# EAGLE board All_in_One_Boards_V2.0 (EAGLE 9.6.2)
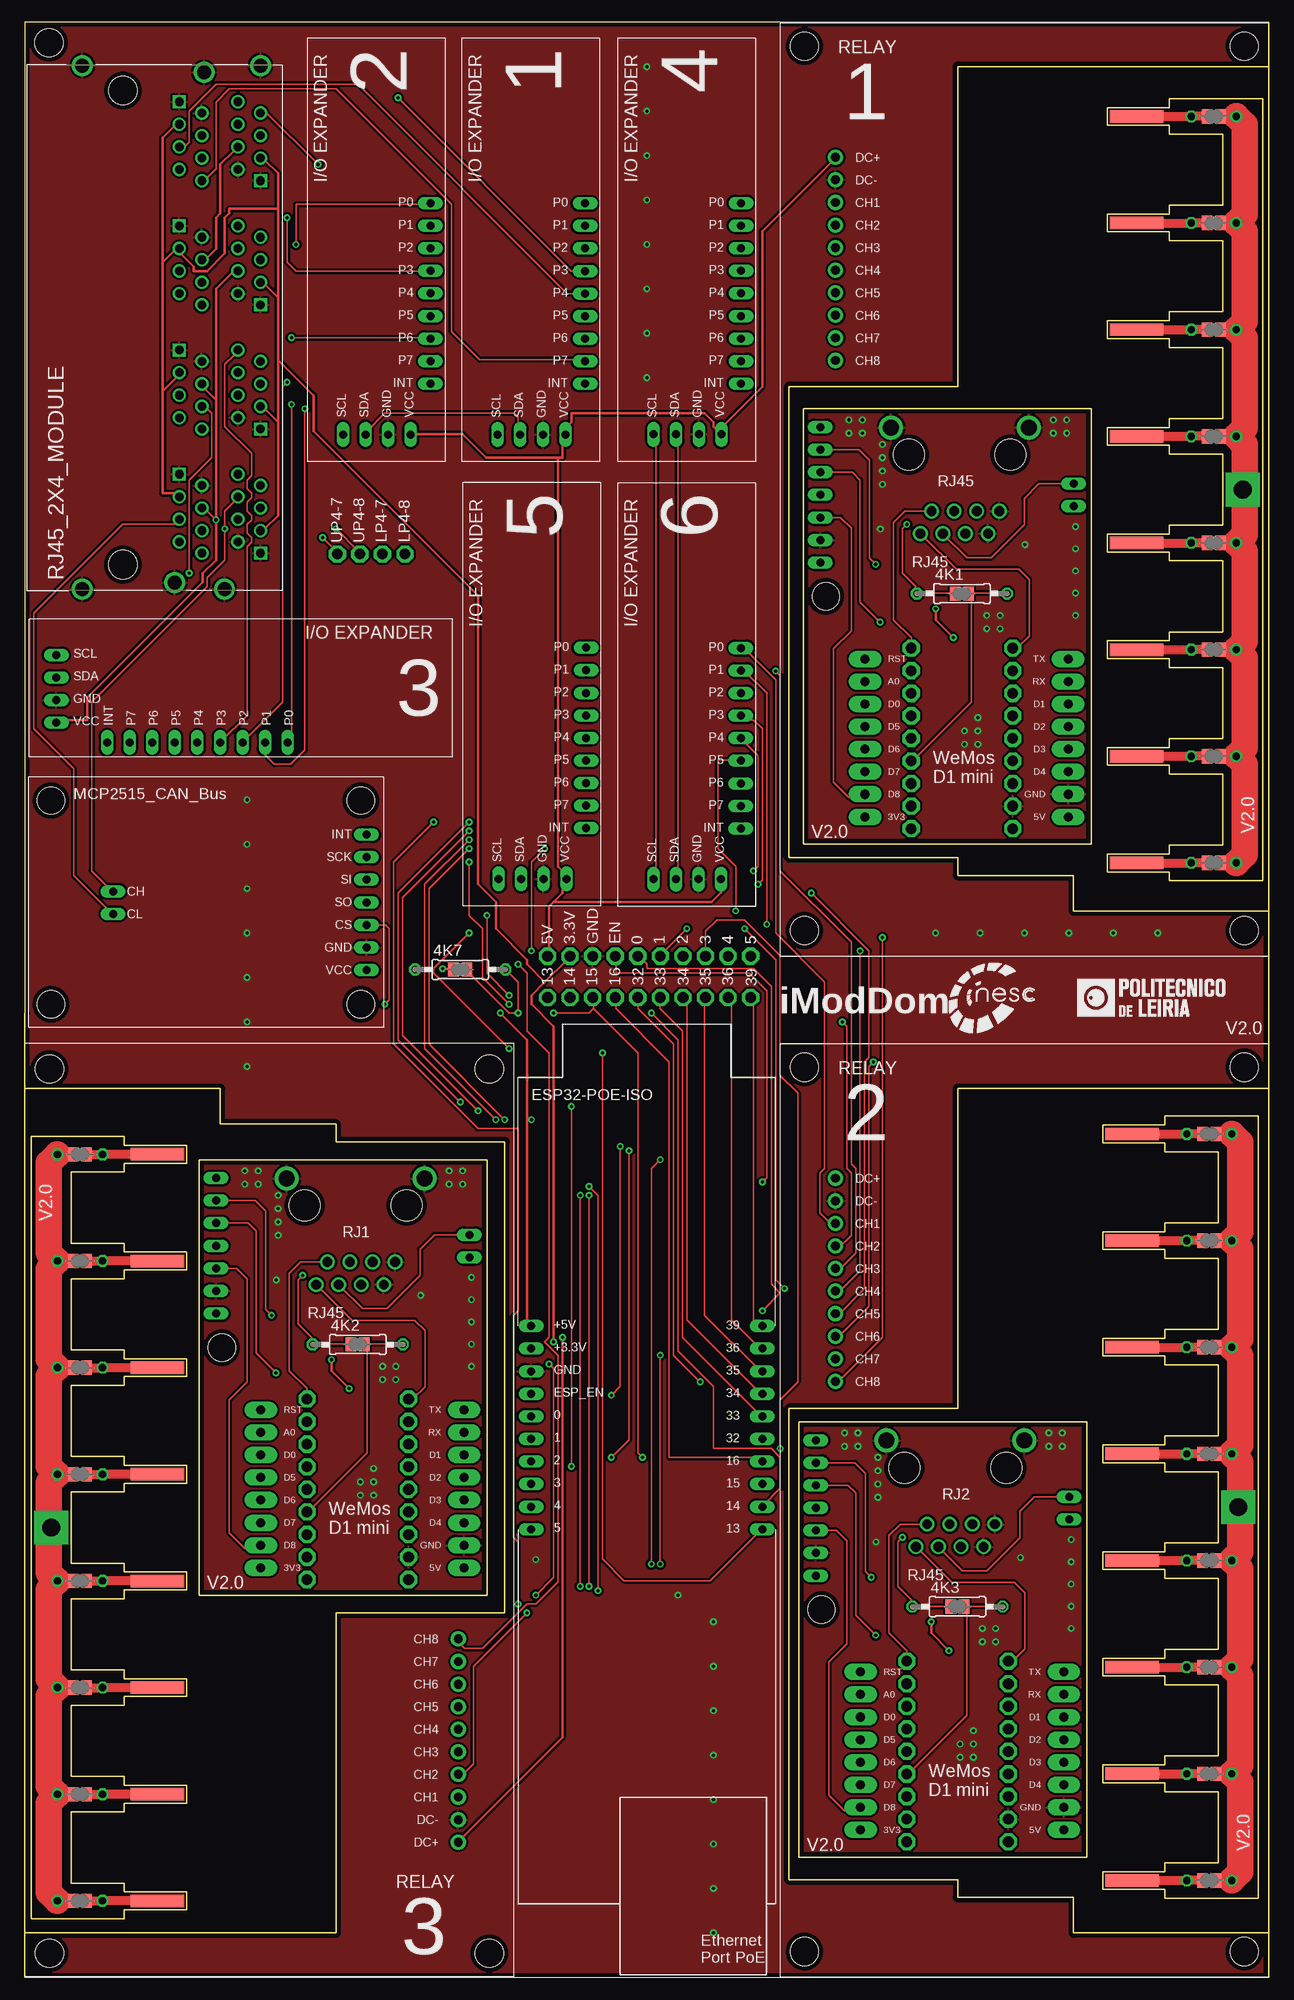
[diagram p0: board, top side]
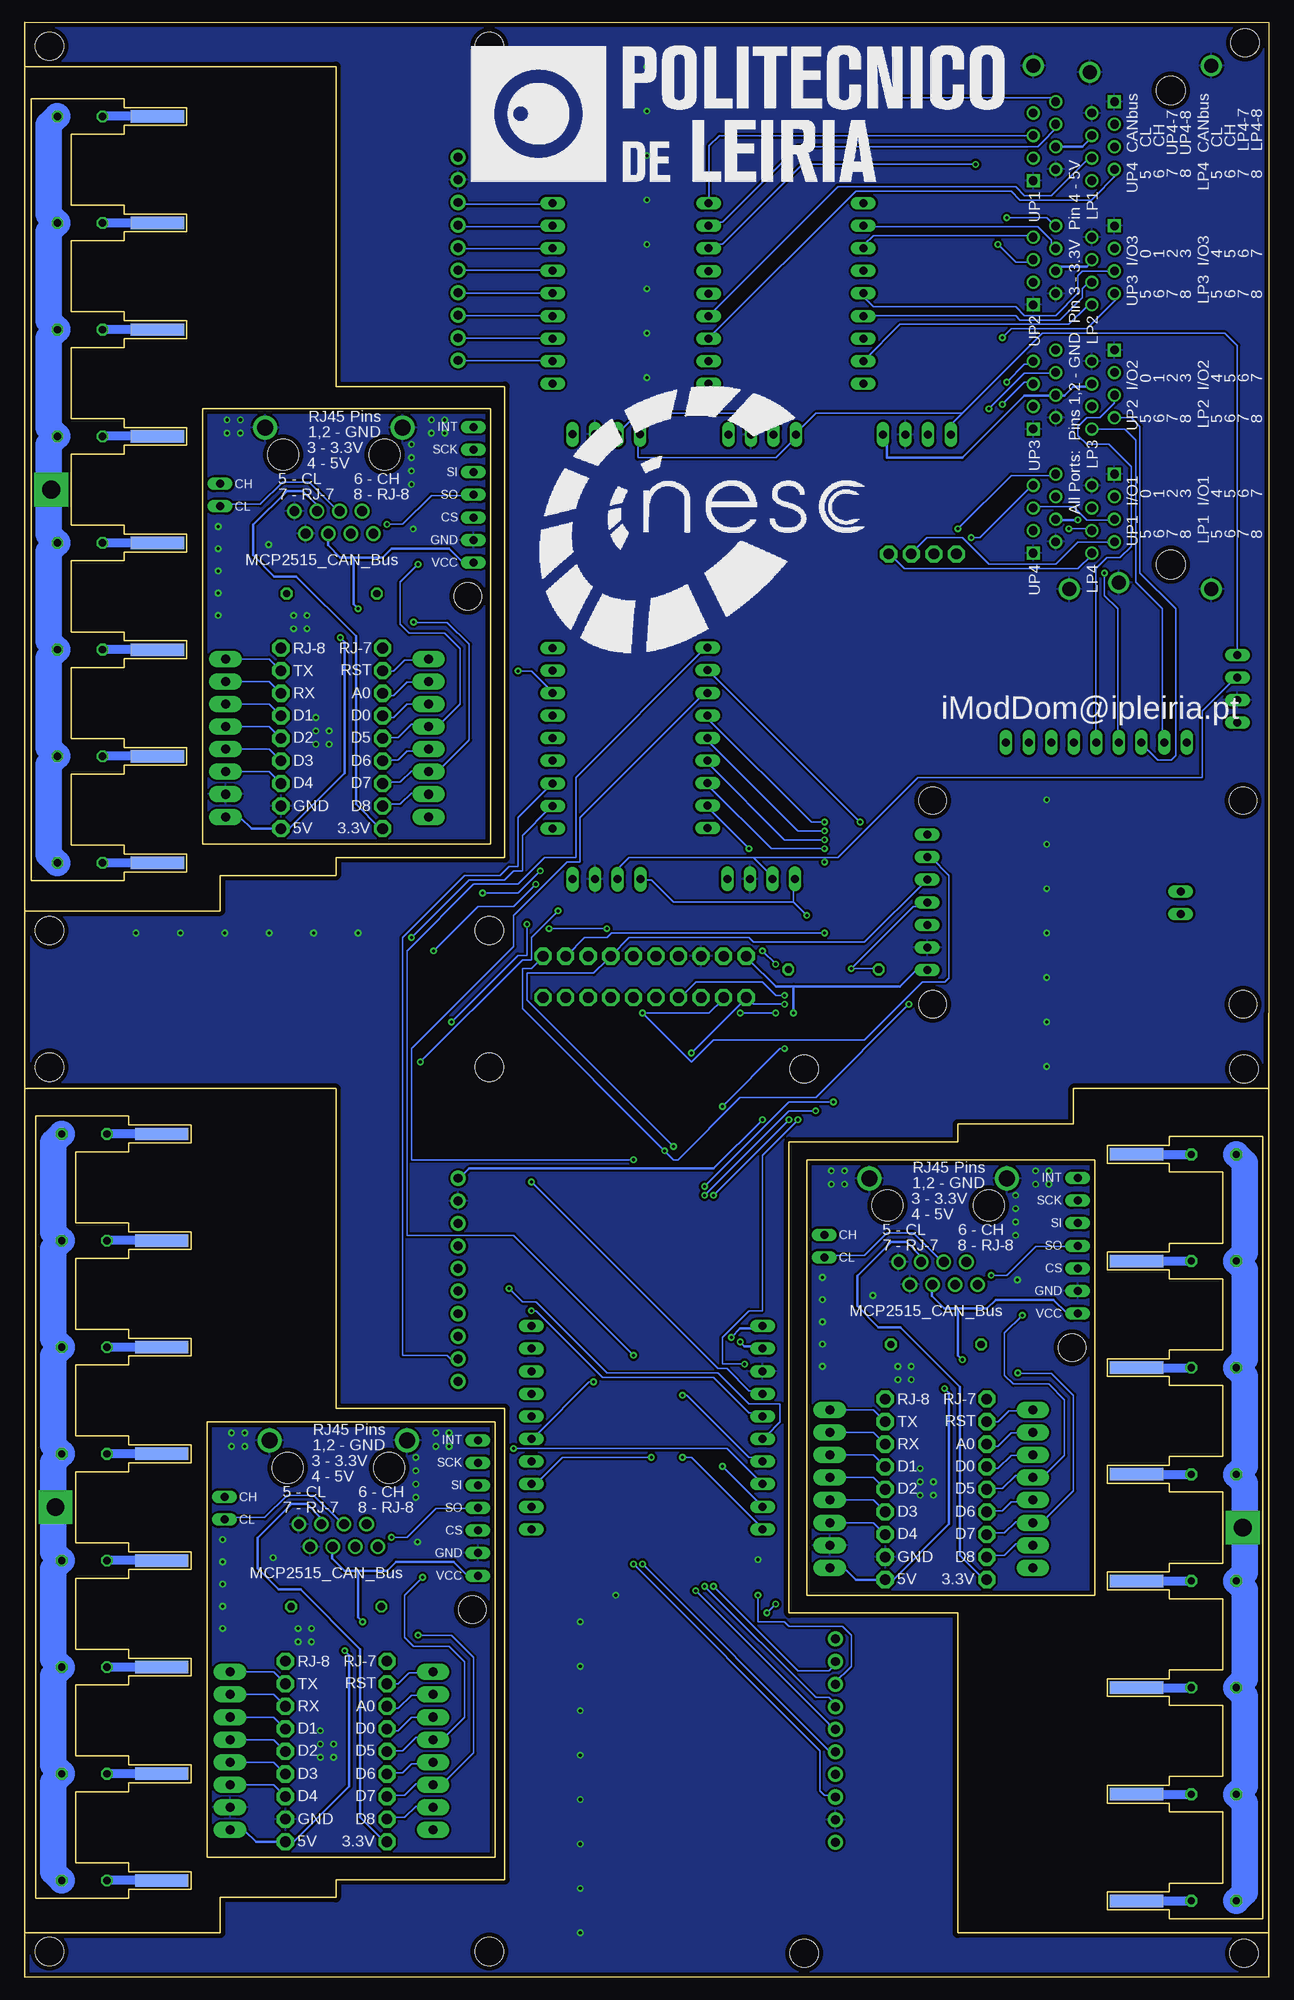
[diagram p1: board, bottom side, seen from below]

Size 140 x 220 mm. Coordinates in mm from the lower left corner, seen from the top.
Outline: 0,5 35,5 35,41 54,41 54,94 35,94 35,96 22,96 22,100 0,100
Outline: 0,5 0,0 140,0 140,5
Outline: 0,100 0,108.5 0,220 140,220 140,215
Outline: 140,215 105,215 105,179 86,179 86,126 105,126 105,124 118,124 118,120 140,120 140,100 105,100 105,64 86,64 86,11 105,11 105,9 118,9 118,5 140,5
Outline: 0,100 0,5
Outline: 140,5 140,215
Outline: 87.6,127.5 87.6,176.5 120,176.5 120,127.5 87.6,127.5
Outline: 19.6,43 19.6,92 52,92 52,43 19.6,43
Outline: 87.1,13.5 87.1,62.5 119.5,62.5 119.5,13.5 87.1,13.5
Copper layers (1*16): Top 0.035mm / dielectric 1.5mm / Bottom 0.035mm
Design rules "default *": minimum track width 6mil, minimum drill 0.35mm, track to track 0.25mm, track to pad 0.25mm, pad to pad 6mil, via to via 6mil, smd to smd 6mil, copper to edge 0.5mm, drill to drill 6mil, minimum pad ring 10mil, minimum via ring 8mil, stop-mask expansion 4mil, vias tented up to drill 0mil, thermal gap 10mil
Net classes: 0 default: width 0.15 mm; 1 +5V: width 0.305 mm; 2 GND: width 0.305 mm; 3 +3.3V: width 0.305 mm; 4 SCL: width 0.15 mm; 5 SDA: width 0.15 mm
Holes 3.2 mm at 2.7,217.7

## Footprints (pad centres in the part's own frame; a part is rotated, then mirrored left to right if it is on the bottom)
0207/10 = drill 0.813 octagon: 1 -5.08,0; 2 5.08,0
ESP-POE = drill 0.9 pad 1.3 long: 0 0,-10.16; 1 0,-12.7; 2 0,-15.24; 3 0,-17.78; 3V3 0,-2.54; 4 0,-20.32; 5 0,-22.86; 5V 0,0; 13 26,-22.86; 14 26,-20.32; 15 26,-17.78; 16 26,-15.24; 32 26,-12.7; 33 26,-10.16; 34 26,-7.62; 35 26,-5.08; 36 26,-2.54; 39 26,0; ESP_EN 0,-7.62; GND 0,-5.08
WEMOS-D1-MINI_SEM_LAYOUT = drill 1.016 pad 1.829 long: 3V3 -10.16,-10.16; 5V 12.7,-10.16; A0 -10.16,5.08; D0 -10.16,2.54; D1 12.7,2.54; D2 12.7,0; D3 12.7,-2.54; D4 12.7,-5.08; D5 -10.16,0; D6 -10.16,-2.54; D7 -10.16,-5.08; D8 -10.16,-7.62; GND 12.7,-7.62; RESET -10.16,7.62; RX 12.7,5.08; TX 12.7,7.62
PCF8574-MODULE_ESPELHADO = drill 0.9 pad 1.3 long: GND 0,-5.08; INT 5.71,-9.85; P0 26.03,-9.85; P1 23.49,-9.85; P2 20.95,-9.85; P3 18.41,-9.85; P4 15.87,-9.85; P5 13.33,-9.85; P6 10.79,-9.85; P7 8.25,-9.85; SCL 0,0; SDA 0,-2.54; VCC 0,-7.62
0204/5 = drill 0.813 octagon: 1 -2.54,0; 2 2.54,0
SSR_M_SEM_LIGACOES = drill 1 pad 1.7: CH1 17.58,3.5; CH2 20.12,3.5; CH3 22.66,3.5; CH4 25.2,3.5; CH5 27.74,3.5; CH6 30.28,3.5; CH7 32.82,3.5; CH8 35.36,3.5; DC+ 12.5,3.5; DC- 15.04,3.5 | hole 3.2: 0,0; 99.5,0; 99.5,49.5; 0,49.5
ALI-RJ45_SEM_LAYOUT = drill 1.1: 1 -4.445,6.35; 2 -3.175,8.89; 3 -1.905,6.35; 4 -0.635,8.89; 5 0.635,6.35; 6 1.905,8.89; 7 3.175,6.35; 8 4.445,8.89 | drill 1.8: P$1 -7.75,-3.05; P$2 7.75,-3.05 | hole 3.5: -5.715,0; 5.715,0
TE_5569262-1 = drill 0.97 square: LP1-1 0,0; LP2-1 13.97,0; LP3-1 27.94,0; LP4-1 41.91,0; UP1-1 8.89,9.14; UP2-1 22.86,9.14; UP3-1 36.83,9.14; UP4-1 50.8,9.14 | drill 0.97: LP1-2 1.27,2.54; LP1-3 2.54,0; LP1-4 3.81,2.54; LP1-5 5.08,0; LP1-6 6.35,2.54; LP1-7 7.62,0; LP1-8 8.89,2.54; LP2-2 15.24,2.54; LP2-3 16.51,0; LP2-4 17.78,2.54; LP2-5 19.05,0; LP2-6 20.32,2.54; LP2-7 21.59,0; LP2-8 22.86,2.54; LP3-2 29.21,2.54; LP3-3 30.48,0; LP3-4 31.75,2.54; LP3-5 33.02,0; LP3-6 34.29,2.54; LP3-7 35.56,0; LP3-8 36.83,2.54; LP4-2 43.18,2.54; LP4-3 44.45,0; LP4-4 45.72,2.54; LP4-5 46.99,0; LP4-6 48.26,2.54; LP4-7 49.53,0; LP4-8 50.8,2.54; UP1-2 7.62,6.6; UP1-3 6.35,9.14; UP1-4 5.08,6.6; UP1-5 3.81,9.14; UP1-6 2.54,6.6; UP1-7 1.27,9.14; UP1-8 0,6.6; UP2-2 21.59,6.6; UP2-3 20.32,9.14; UP2-4 19.05,6.6; UP2-5 17.78,9.14; UP2-6 16.51,6.6; UP2-7 15.24,9.14; UP2-8 13.97,6.6; UP3-2 35.56,6.6; UP3-3 34.29,9.14; UP3-4 33.02,6.6; UP3-5 31.75,9.14; UP3-6 30.48,6.6; UP3-7 29.21,9.14; UP3-8 27.94,6.6; UP4-2 49.53,6.6; UP4-3 48.26,9.14; UP4-4 46.99,6.6; UP4-5 45.72,9.14; UP4-6 44.45,6.6; UP4-7 43.18,9.14; UP4-8 41.91,6.6 | drill 1.57: S1 -4.06,-10.92; S2 54.87,-10.92; S3 -4.06,9.14; S4 54.11,-0.51; S5 -3.3,2.79; S6 54.87,5.08 | hole 3.25: -1.27,-6.35; 52.08,-6.35
SJ = smd 1.168 x 1.6: 1 -0.762,0; 2 0.762,0
TP = drill 1.2 pad 1.93 octagon: P$1 0,0
MCP2515_MODULE_SEM_LIGACOES = drill 0.9 pad 1.3 long: CH -27.925,12.703; CL -27.925,10.163; CS 0.605,8.923; GND 0.605,6.383; INT 0.605,19.083; MISO 0.605,11.463; MOSI 0.605,14.003; SCK 0.605,16.543; VCC 0.605,3.843 | hole 3.1: -0.035,0.013; -0.035,22.913; -34.935,22.913; -34.935,0.013
MCP2515_MODULE_SEM_LAYOUT = drill 0.9 pad 1.3 long: CH 28.52,-6.38; CL 28.52,-8.92; CS 0,-10.16; GND 0,-12.7; INT 0,0; MISO 0,-7.62; MOSI 0,-5.08; SCK 0,-2.54; VCC 0,-15.24 | hole 3.1: 0.63,-19.07
SHUNT2 = smd 1.4 x 6: P$1 -85,-3.3; P$2 -73,-3.3; P$3 -61,-3.3; P$4 -49,-3.3; P$5 -37,-3.3; P$6 -25,-3.3; P$7 -13,-3.3; P$8 -1,-3.3 | smd 1.4 x 6 bottom: P$10 -85,-3.3; P$11 -73,-3.3; P$12 -61,-3.3; P$13 -49,-3.3; P$14 -37,-3.3; P$15 -25,-3.3; P$16 -13,-3.3; P$17 -1,-3.3 | drill 2 pad 3.81 square: P$18 -43,-15.25

## Placement (x,y rotation side)
4K1  [0207/10]  105.46,155.71 0 top
4K2  [0207/10]  37.46,71.21 0 top
4K3  [0207/10]  104.96,41.71 0 top
4K7  [0207/10]  49,113.4 0 top
ESP32-POE-ISO  ESP-POE  [ESP-POE]  56.98,73.28 0 top
ESP8266D1MINI  [WEMOS-D1-MINI_SEM_LAYOUT]  104.72,140.74 0 top
ESP8266D1MINI1  [WEMOS-D1-MINI_SEM_LAYOUT]  36.72,56.24 0 top
ESP8266D1MINI2  [WEMOS-D1-MINI_SEM_LAYOUT]  104.22,26.74 0 top
I/O_EXPANDER  PCF8574-MODULE_ESPELHADO  [PCF8574-MODULE_ESPELHADO]  53.32,123.59 90 top
I/O_EXPANDER_1  PCF8574-MODULE_ESPELHADO  [PCF8574-MODULE_ESPELHADO]  53.21,173.6 90 top
I/O_EXPANDER_2  PCF8574-MODULE_ESPELHADO  [PCF8574-MODULE_ESPELHADO]  35.81,173.62 90 top
I/O_EXPANDER_3  PCF8574-MODULE_ESPELHADO  [PCF8574-MODULE_ESPELHADO]  3.54,148.8 0 top
I/O_EXPANDER_4  PCF8574-MODULE_ESPELHADO  [PCF8574-MODULE_ESPELHADO]  70.76,173.62 90 top
I/O_EXPANDER_6  PCF8574-MODULE_ESPELHADO  [PCF8574-MODULE_ESPELHADO]  70.74,123.56 90 top
R1  [0204/5]  133.3,10.9 180 top
R2  [0204/5]  133.3,22.9 180 top
R3  [0204/5]  133.3,34.9 180 top
R4  [0204/5]  133.3,46.9 180 top
R5  [0204/5]  133.3,58.9 180 top
R6  [0204/5]  133.3,70.9 180 top
R7  [0204/5]  133.3,82.9 180 top
R8  [0204/5]  133.3,94.9 180 top
R9  [0204/5]  6.2,92.6 0 top
R10  [0204/5]  6.2,80.6 0 top
R11  [0204/5]  133.8,125.4 180 top
R12  [0204/5]  6.2,68.6 0 top
R13  [0204/5]  6.2,56.6 0 top
R14  [0204/5]  6.2,44.6 0 top
R15  [0204/5]  6.2,32.6 0 top
R16  [0204/5]  6.2,20.6 0 top
R17  [0204/5]  6.2,8.6 0 top
R18  [0204/5]  133.8,137.4 180 top
R19  [0204/5]  133.8,149.4 180 top
R20  [0204/5]  133.8,161.4 180 top
R21  [0204/5]  133.8,173.4 180 top
R22  [0204/5]  133.8,185.4 180 top
R23  [0204/5]  133.8,197.4 180 top
R24  [0204/5]  133.8,209.4 180 top
RELAY_1  SSR_M_FULL_SEM_LIGACOES  [SSR_M_SEM_LIGACOES]  87.74,217.3 270 top
RELAY_2  SSR_M_FULL_SEM_LIGACOES  [SSR_M_SEM_LIGACOES]  52.28,2.7 90 top
RELAY_3  SSR_M_FULL_SEM_LIGACOES  [SSR_M_SEM_LIGACOES]  87.74,102.41 270 top
RJ1  ALI-RJ45_SEM_LAYOUT  [ALI-RJ45_SEM_LAYOUT]  37.22,86.84 180 top
RJ2  ALI-RJ45_SEM_LAYOUT  [ALI-RJ45_SEM_LAYOUT]  104.72,57.34 180 top
RJ45  ALI-RJ45_SEM_LAYOUT  [ALI-RJ45_SEM_LAYOUT]  105.22,171.34 180 top
RJ45_2X4_MODULE  5569262-1  [TE_5569262-1]  17.38,211.06 270 top
SJ1  [SJ]  49,113.4 0 top
SJ2  [SJ]  105.46,155.71 0 top
SJ3  [SJ]  37.46,71.21 0 top
SJ4  [SJ]  133.3,58.9 180 top
SJ5  [SJ]  133.3,82.9 180 top
SJ6  [SJ]  133.3,94.9 180 top
SJ7  [SJ]  133.3,10.9 180 top
SJ8  [SJ]  133.3,22.9 180 top
SJ9  [SJ]  133.3,34.9 180 top
SJ10  [SJ]  133.8,173.4 180 top
SJ11  [SJ]  133.3,46.9 180 top
SJ12  [SJ]  133.3,70.9 180 top
SJ13  [SJ]  6.2,44.6 0 top
SJ14  [SJ]  6.2,20.6 0 top
SJ15  [SJ]  6.2,8.6 0 top
SJ16  [SJ]  6.2,92.6 0 top
SJ17  [SJ]  133.8,197.4 180 top
SJ18  [SJ]  6.2,80.6 0 top
SJ19  [SJ]  133.8,209.4 180 top
SJ20  [SJ]  133.8,125.4 180 top
SJ21  [SJ]  133.8,137.4 180 top
SJ22  [SJ]  133.8,149.4 180 top
SJ23  [SJ]  133.8,161.4 180 top
SJ24  [SJ]  133.8,185.4 180 top
SJ25  [SJ]  6.2,68.6 0 top
SJ26  [SJ]  6.2,56.6 0 top
SJ27  [SJ]  6.2,32.6 0 top
SJ28  [SJ]  104.96,41.71 0 top
U$1  TP  [TP]  35.16,160.16 90 top
U$2  TP  [TP]  58.82,114.9 90 top
U$3  TP  [TP]  99.75,147.03 0 top
U$4  TP  [TP]  37.7,160.16 0 bottom
U$5  TP  [TP]  40.24,160.16 0 top
U$6  TP  [TP]  61.36,114.9 90 bottom
U$7  TP  [TP]  63.9,114.9 90 top
U$8  TP  [TP]  66.44,114.9 90 top
U$9  TP  [TP]  68.98,114.9 90 top
U$10  TP  [TP]  71.52,114.9 90 top
U$11  TP  [TP]  74.06,114.9 90 top
U$12  TP  [TP]  76.6,114.9 90 bottom
U$13  TP  [TP]  79.14,114.9 90 bottom
U$14  TP  [TP]  81.68,114.9 90 top
U$15  TP  [TP]  81.68,110.26 270 bottom
U$16  TP  [TP]  79.14,110.26 270 top
U$17  TP  [TP]  76.6,110.26 270 top
U$18  TP  [TP]  74.06,110.26 270 top
U$19  TP  [TP]  71.52,110.26 270 top
U$20  TP  [TP]  68.98,110.26 270 top
U$21  TP  [TP]  66.44,110.26 270 top
U$22  TP  [TP]  63.9,110.26 270 top
U$23  TP  [TP]  61.36,110.26 270 top
U$24  TP  [TP]  58.82,110.26 270 top
U$25  TP  [TP]  42.78,160.16 0 top
U$26  MCP2515_MODULE_SEM_LIGACOES  [MCP2515_MODULE_SEM_LIGACOES]  37.85,109.5 0 top
U$27  TP  [TP]  99.75,144.49 0 top
U$28  TP  [TP]  99.75,141.95 0 top
U$29  TP  [TP]  99.75,139.41 0 top
U$30  TP  [TP]  99.75,136.87 0 top
U$31  MCP2515_MODULE_SEM_LAYOUT  [MCP2515_MODULE_SEM_LAYOUT]  89.52,174.44 0 top
U$32  TP  [TP]  99.75,134.33 0 top
U$33  TP  [TP]  99.75,131.79 0 top
U$34  TP  [TP]  99.75,129.25 0 top
U$35  TP  [TP]  111.18,147.03 0 top
U$36  TP  [TP]  111.18,144.49 0 top
U$37  TP  [TP]  111.18,141.95 0 top
U$38  TP  [TP]  111.18,139.41 0 top
U$39  TP  [TP]  111.18,136.87 0 top
U$40  TP  [TP]  111.18,134.33 0 top
U$41  TP  [TP]  111.18,131.79 0 top
U$42  TP  [TP]  111.18,129.25 0 top
U$43  TP  [TP]  99.75,149.57 0 top
U$44  TP  [TP]  111.18,149.57 0 top
U$45  MCP2515_MODULE_SEM_LAYOUT  [MCP2515_MODULE_SEM_LAYOUT]  21.52,89.94 0 top
U$46  TP  [TP]  31.75,62.53 0 top
U$47  TP  [TP]  31.75,59.99 0 top
U$48  TP  [TP]  31.75,57.45 0 top
U$49  TP  [TP]  31.75,54.91 0 top
U$50  TP  [TP]  31.75,52.37 0 top
U$51  TP  [TP]  31.75,49.83 0 top
U$52  TP  [TP]  31.75,47.29 0 top
U$53  TP  [TP]  31.75,44.75 0 top
U$54  TP  [TP]  43.18,62.53 0 top
U$55  TP  [TP]  43.18,59.99 0 top
U$56  TP  [TP]  43.18,57.45 0 top
U$57  TP  [TP]  43.18,54.91 0 top
U$58  TP  [TP]  43.18,52.37 0 top
U$59  TP  [TP]  43.18,49.83 0 top
U$60  TP  [TP]  43.18,47.29 0 top
U$61  TP  [TP]  43.18,44.75 0 top
U$62  TP  [TP]  31.75,65.07 0 top
U$63  TP  [TP]  43.18,65.07 0 top
U$64  SHUNT2  [SHUNT2]  121.8,210.4 90 top
U$65  SHUNT2  [SHUNT2]  121.3,95.9 90 top
U$66  SHUNT2  [SHUNT2]  18.2,7.6 270 top
U$67  MCP2515_MODULE_SEM_LAYOUT  [MCP2515_MODULE_SEM_LAYOUT]  89.02,60.44 0 top
U$68  TP  [TP]  99.25,33.03 0 top
U$69  TP  [TP]  99.25,30.49 0 top
U$70  TP  [TP]  99.25,27.95 0 top
U$71  TP  [TP]  99.25,25.41 0 top
U$72  TP  [TP]  99.25,22.87 0 top
U$73  TP  [TP]  99.25,20.33 0 top
U$74  TP  [TP]  99.25,17.79 0 top
U$75  TP  [TP]  99.25,15.25 0 top
U$76  TP  [TP]  110.68,33.03 0 top
U$77  TP  [TP]  110.68,30.49 0 top
U$78  TP  [TP]  110.68,27.95 0 top
U$79  TP  [TP]  110.68,25.41 0 top
U$80  TP  [TP]  110.68,22.87 0 top
U$81  TP  [TP]  110.68,20.33 0 top
U$82  TP  [TP]  110.68,17.79 0 top
U$83  TP  [TP]  110.68,15.25 0 top
U$84  TP  [TP]  99.25,35.57 0 top
U$85  TP  [TP]  110.68,35.57 0 top

## Library data of the parts
4K1-4K3 4K7 R1-R24 = rcl; SPICEPREFIX: R
ESP32-POE-ISO = ESP-POE-RevB
ESP8266D1MINI ESP8266D1MINI1 ESP8266D1MINI2 = esp8266modules
I/O_EXPANDER I/O_EXPANDER_1-I/O_EXPANDER_4 I/O_EXPANDER_6 = PCF8574_Module
RELAY_1-RELAY_3 = Solid-State-Relay_Module
RJ1 RJ2 RJ45 = AliExpressRJ45
RJ45_2X4_MODULE = RJ45_2x4; AVAILABILITY: Good; CENTERLINE_PITCH: 1.02 mm[.04 in]; COMMENT: 5569262-1; DESCRIPTION: Conn RJ-45 F 64 POS 2.54mm Solder RA Thru-Hole 64 Terminal 8 Port Cat 5 Tray; EU_ROHS_COMPLIANCE: Compliant; MF: TE Connectivity; MP: 5569262-1; NUMBER_OF_POSITIONS: 8; PACKAGE: None; PRICE: None; PURCHASE-URL: https://pricing.snapeda.com/search/part/5569262-1/?ref=eda
SJ1-SJ28 = jumper
U$1-U$25 U$27-U$30 U$32-U$44 U$46-U$63 U$68-U$85 = edurobotParts
U$26 U$31 U$45 U$67 = MCP2515_Module
U$64-U$66 = Shunt2

## Nets
+3V3 [+3.3V]: ESP32-POE-ISO.3V3 RJ45_2X4_MODULE.LP1-3 RJ45_2X4_MODULE.LP2-3 RJ45_2X4_MODULE.LP3-3 RJ45_2X4_MODULE.LP4-3 RJ45_2X4_MODULE.UP1-3 RJ45_2X4_MODULE.UP2-3 RJ45_2X4_MODULE.UP3-3 RJ45_2X4_MODULE.UP4-3 U$6.P$1
+5V [+5V]: ESP32-POE-ISO.5V I/O_EXPANDER.VCC I/O_EXPANDER_1.VCC I/O_EXPANDER_2.VCC I/O_EXPANDER_3.VCC I/O_EXPANDER_4.VCC I/O_EXPANDER_6.VCC RELAY_1.DC+ RELAY_2.DC+ RELAY_3.DC+ RJ45_2X4_MODULE.LP1-4 RJ45_2X4_MODULE.LP2-4 RJ45_2X4_MODULE.LP3-4 RJ45_2X4_MODULE.LP4-4 RJ45_2X4_MODULE.UP1-4 RJ45_2X4_MODULE.UP2-4 RJ45_2X4_MODULE.UP3-4 RJ45_2X4_MODULE.UP4-4 U$2.P$1 U$26.VCC
GND [GND]: ESP32-POE-ISO.GND I/O_EXPANDER.GND I/O_EXPANDER_1.GND I/O_EXPANDER_2.GND I/O_EXPANDER_3.GND I/O_EXPANDER_4.GND I/O_EXPANDER_6.GND RELAY_1.DC- RELAY_2.DC- RELAY_3.DC- RJ45_2X4_MODULE.LP1-1 RJ45_2X4_MODULE.LP1-2 RJ45_2X4_MODULE.LP2-1 RJ45_2X4_MODULE.LP2-2 RJ45_2X4_MODULE.LP3-1 RJ45_2X4_MODULE.LP3-2 RJ45_2X4_MODULE.LP4-1 RJ45_2X4_MODULE.LP4-2 RJ45_2X4_MODULE.S1 RJ45_2X4_MODULE.S2 RJ45_2X4_MODULE.S3 RJ45_2X4_MODULE.S4 RJ45_2X4_MODULE.S5 RJ45_2X4_MODULE.S6 RJ45_2X4_MODULE.UP1-1 RJ45_2X4_MODULE.UP1-2 RJ45_2X4_MODULE.UP2-1 RJ45_2X4_MODULE.UP2-2 RJ45_2X4_MODULE.UP3-1 RJ45_2X4_MODULE.UP3-2 RJ45_2X4_MODULE.UP4-1 RJ45_2X4_MODULE.UP4-2 U$7.P$1 U$26.GND
GND1 [GND]: ESP8266D1MINI.GND RJ45.1 RJ45.2 RJ45.P$1 RJ45.P$2 U$31.GND U$41.P$1
GND2 [GND]: ESP8266D1MINI1.GND RJ1.1 RJ1.2 RJ1.P$1 RJ1.P$2 U$45.GND U$60.P$1
GND3 [GND]: ESP8266D1MINI2.GND RJ2.1 RJ2.2 RJ2.P$1 RJ2.P$2 U$67.GND U$82.P$1
N$1: I/O_EXPANDER_1.P0 RJ45_2X4_MODULE.UP1-5
N$2: I/O_EXPANDER_1.P1 RJ45_2X4_MODULE.UP1-6
N$3: I/O_EXPANDER_1.P2 RJ45_2X4_MODULE.UP1-7
N$4: ESP32-POE-ISO.ESP_EN U$8.P$1
N$5: ESP32-POE-ISO.0 U$9.P$1
N$6: ESP32-POE-ISO.1 U$10.P$1
N$7: ESP32-POE-ISO.2 U$11.P$1 U$26.MOSI
N$8: ESP32-POE-ISO.3 U$12.P$1
N$9: ESP32-POE-ISO.4 U$13.P$1
N$10: ESP32-POE-ISO.5 U$14.P$1 U$26.CS
N$11: ESP32-POE-ISO.39 U$15.P$1
N$12: ESP32-POE-ISO.36 U$16.P$1
N$13: ESP32-POE-ISO.35 U$17.P$1
N$14: ESP32-POE-ISO.34 U$18.P$1
N$15: ESP32-POE-ISO.33 U$19.P$1
N$16: ESP32-POE-ISO.32 U$20.P$1
N$17: I/O_EXPANDER_1.P3 RJ45_2X4_MODULE.UP1-8
N$18: 4K7.2 ESP32-POE-ISO.15 SJ1.2 U$22.P$1
N$19: ESP32-POE-ISO.14 U$23.P$1 U$26.SCK
N$20: I/O_EXPANDER_2.P0 RJ45_2X4_MODULE.UP2-5
N$21: I/O_EXPANDER_4.P0 RELAY_1.CH1
N$22: I/O_EXPANDER_4.P1 RELAY_1.CH2
N$23: I/O_EXPANDER_4.P2 RELAY_1.CH3
N$24: I/O_EXPANDER_4.P3 RELAY_1.CH4
N$25: I/O_EXPANDER_4.P4 RELAY_1.CH5
N$26: I/O_EXPANDER_2.P1 RJ45_2X4_MODULE.UP2-6
N$27: I/O_EXPANDER_4.P5 RELAY_1.CH6
N$28: I/O_EXPANDER_4.P6 RELAY_1.CH7
N$29: I/O_EXPANDER_4.P7 RELAY_1.CH8
N$30: I/O_EXPANDER_6.P0 RELAY_3.CH1
N$31: I/O_EXPANDER_6.P1 RELAY_3.CH2
N$32: I/O_EXPANDER_6.P2 RELAY_3.CH3
N$33: I/O_EXPANDER_6.P3 RELAY_3.CH4
N$34: I/O_EXPANDER_6.P4 RELAY_3.CH5
N$35: I/O_EXPANDER_6.P5 RELAY_3.CH6
N$36: I/O_EXPANDER_6.P6 RELAY_3.CH7
N$37: I/O_EXPANDER_6.P7 RELAY_3.CH8
N$38: I/O_EXPANDER.P0 RELAY_2.CH1
N$39: I/O_EXPANDER.P1 RELAY_2.CH2
N$40: I/O_EXPANDER.P2 RELAY_2.CH3
N$41: I/O_EXPANDER.P3 RELAY_2.CH4
N$42: I/O_EXPANDER.P4 RELAY_2.CH5
N$43: I/O_EXPANDER.P5 RELAY_2.CH6
N$44: I/O_EXPANDER.P6 RELAY_2.CH7
N$45: I/O_EXPANDER.P7 RELAY_2.CH8
N$46: I/O_EXPANDER_1.P4 RJ45_2X4_MODULE.LP1-5
N$47: I/O_EXPANDER_1.P5 RJ45_2X4_MODULE.LP1-6
N$48: I/O_EXPANDER_1.P6 RJ45_2X4_MODULE.LP1-7
N$49: I/O_EXPANDER_1.P7 RJ45_2X4_MODULE.LP1-8
N$50: I/O_EXPANDER_2.P2 RJ45_2X4_MODULE.UP2-7
N$51: I/O_EXPANDER_2.P3 RJ45_2X4_MODULE.UP2-8
N$52: I/O_EXPANDER_2.P4 RJ45_2X4_MODULE.LP2-5
N$53: I/O_EXPANDER_2.P5 RJ45_2X4_MODULE.LP2-6
N$54: I/O_EXPANDER_2.P6 RJ45_2X4_MODULE.LP2-7
N$55: I/O_EXPANDER_2.P7 RJ45_2X4_MODULE.LP2-8
N$56: 4K7.1 SJ1.1 U$26.MISO
N$57: I/O_EXPANDER_3.P0 RJ45_2X4_MODULE.UP3-5
N$58 [SCL]: RJ45_2X4_MODULE.LP4-5 RJ45_2X4_MODULE.UP4-5 U$26.CL
N$59: I/O_EXPANDER_3.P1 RJ45_2X4_MODULE.UP3-6
N$60: I/O_EXPANDER_3.P2 RJ45_2X4_MODULE.UP3-7
N$61: I/O_EXPANDER_3.P3 RJ45_2X4_MODULE.UP3-8
N$62: I/O_EXPANDER_3.P4 RJ45_2X4_MODULE.LP3-5
N$63: I/O_EXPANDER_3.P5 RJ45_2X4_MODULE.LP3-6
N$64: I/O_EXPANDER_3.P6 RJ45_2X4_MODULE.LP3-7
N$65: I/O_EXPANDER_3.P7 RJ45_2X4_MODULE.LP3-8
N$66 [+3.3V]: RJ45.3 U$34.P$1
N$67: RJ45.7 U$43.P$1
N$68: RJ45.8 U$44.P$1
N$69: RJ45_2X4_MODULE.UP4-7 U$1.P$1
N$70: RJ45_2X4_MODULE.UP4-8 U$4.P$1
N$71: RJ45_2X4_MODULE.LP4-7 U$5.P$1
N$72: RJ45_2X4_MODULE.LP4-8 U$25.P$1
N$73 [SCL]: RJ45_2X4_MODULE.LP4-6 RJ45_2X4_MODULE.UP4-6 U$26.CH
N$74: ESP8266D1MINI.RESET U$3.P$1
N$75: ESP8266D1MINI.A0 U$27.P$1
N$76: ESP8266D1MINI.D0 U$28.P$1
N$77: ESP8266D1MINI.D5 U$29.P$1 U$31.SCK
N$78: 4K1.2 ESP8266D1MINI.D6 SJ2.2 U$30.P$1
N$79: ESP8266D1MINI.D7 U$31.MOSI U$32.P$1
N$80: ESP8266D1MINI.D8 U$31.CS U$33.P$1
N$81: ESP8266D1MINI.D4 U$40.P$1
N$82: ESP8266D1MINI.D3 U$39.P$1
N$83: ESP8266D1MINI.D2 U$38.P$1
N$84: ESP8266D1MINI.D1 U$37.P$1
N$85: ESP8266D1MINI.RX U$36.P$1
N$86: ESP8266D1MINI.TX U$35.P$1
N$87 [+5V]: ESP8266D1MINI.5V RJ45.4 U$31.VCC U$42.P$1
N$88: RJ45.5 U$31.CL
N$89: RJ45.6 U$31.CH
N$90: 4K1.1 SJ2.1 U$31.MISO
N$91 [+3.3V]: RJ1.3 U$53.P$1
N$92: RJ1.7 U$62.P$1
N$93: RJ1.8 U$63.P$1
N$94: ESP8266D1MINI1.RESET U$46.P$1
N$95: ESP8266D1MINI1.A0 U$47.P$1
N$96: ESP8266D1MINI1.D0 U$48.P$1
N$97: ESP8266D1MINI1.D5 U$45.SCK U$49.P$1
N$98: 4K2.2 ESP8266D1MINI1.D6 SJ3.2 U$50.P$1
N$99: ESP8266D1MINI1.D7 U$45.MOSI U$51.P$1
N$100: ESP8266D1MINI1.D8 U$45.CS U$52.P$1
N$101: ESP8266D1MINI1.D4 U$59.P$1
N$102: ESP8266D1MINI1.D3 U$58.P$1
N$103: ESP8266D1MINI1.D2 U$57.P$1
N$104: ESP8266D1MINI1.D1 U$56.P$1
N$105: ESP8266D1MINI1.RX U$55.P$1
N$106: ESP8266D1MINI1.TX U$54.P$1
N$107 [+5V]: ESP8266D1MINI1.5V RJ1.4 U$45.VCC U$61.P$1
N$108: RJ1.5 U$45.CL
N$109: RJ1.6 U$45.CH
N$110: 4K2.1 SJ3.1 U$45.MISO
N$111: R18.2 SJ21.2 U$64.P$2 U$64.P$11
N$112: R19.2 SJ22.2 U$64.P$3 U$64.P$12
N$113: R20.2 SJ23.2 U$64.P$4 U$64.P$13
N$114: R21.2 SJ10.2 U$64.P$5 U$64.P$14
N$115: R22.2 SJ24.2 U$64.P$6 U$64.P$15
N$116: R23.2 SJ17.2 U$64.P$7 U$64.P$16
N$117: R24.2 SJ19.2 U$64.P$8 U$64.P$17
N$118: R11.1 R18.1 R19.1 R20.1 R21.1 R22.1 R23.1 R24.1 SJ10.1 SJ17.1 SJ19.1 SJ20.1 SJ21.1 SJ22.1 SJ23.1 SJ24.1 U$64.P$18
N$119: R11.2 SJ20.2 U$64.P$1 U$64.P$10
N$120: R2.2 SJ8.2 U$65.P$2 U$65.P$11
N$121: R3.2 SJ9.2 U$65.P$3 U$65.P$12
N$122: R4.2 SJ11.2 U$65.P$4 U$65.P$13
N$123: R5.2 SJ4.2 U$65.P$5 U$65.P$14
N$124: R6.2 SJ12.2 U$65.P$6 U$65.P$15
N$125: R7.2 SJ5.2 U$65.P$7 U$65.P$16
N$126: R8.2 SJ6.2 U$65.P$8 U$65.P$17
N$127: R1.1 R2.1 R3.1 R4.1 R5.1 R6.1 R7.1 R8.1 SJ4.1 SJ5.1 SJ6.1 SJ7.1 SJ8.1 SJ9.1 SJ11.1 SJ12.1 U$65.P$18
N$128: R1.2 SJ7.2 U$65.P$1 U$65.P$10
N$129: R10.2 SJ18.2 U$66.P$2 U$66.P$11
N$130: R12.2 SJ25.2 U$66.P$3 U$66.P$12
N$131: R13.2 SJ26.2 U$66.P$4 U$66.P$13
N$132: R14.2 SJ13.2 U$66.P$5 U$66.P$14
N$133: R15.2 SJ27.2 U$66.P$6 U$66.P$15
N$134: R16.2 SJ14.2 U$66.P$7 U$66.P$16
N$135: R17.2 SJ15.2 U$66.P$8 U$66.P$17
N$136: R9.1 R10.1 R12.1 R13.1 R14.1 R15.1 R16.1 R17.1 SJ13.1 SJ14.1 SJ15.1 SJ16.1 SJ18.1 SJ25.1 SJ26.1 SJ27.1 U$66.P$18
N$137: R9.2 SJ16.2 U$66.P$1 U$66.P$10
N$138 [+3.3V]: RJ2.3 U$75.P$1
N$139: RJ2.7 U$84.P$1
N$140: RJ2.8 U$85.P$1
N$141: ESP8266D1MINI2.RESET U$68.P$1
N$142: ESP8266D1MINI2.A0 U$69.P$1
N$143: ESP8266D1MINI2.D0 U$70.P$1
N$144: ESP8266D1MINI2.D5 U$67.SCK U$71.P$1
N$145: 4K3.2 ESP8266D1MINI2.D6 SJ28.2 U$72.P$1
N$146: ESP8266D1MINI2.D7 U$67.MOSI U$73.P$1
N$147: ESP8266D1MINI2.D8 U$67.CS U$74.P$1
N$148: ESP8266D1MINI2.D4 U$81.P$1
N$149: ESP8266D1MINI2.D3 U$80.P$1
N$150: ESP8266D1MINI2.D2 U$79.P$1
N$151: ESP8266D1MINI2.D1 U$78.P$1
N$152: ESP8266D1MINI2.RX U$77.P$1
N$153: ESP8266D1MINI2.TX U$76.P$1
N$154 [+5V]: ESP8266D1MINI2.5V RJ2.4 U$67.VCC U$83.P$1
N$155: RJ2.5 U$67.CL
N$156: RJ2.6 U$67.CH
N$157: 4K3.1 SJ28.1 U$67.MISO
SCL: ESP32-POE-ISO.16 I/O_EXPANDER.SCL I/O_EXPANDER_1.SCL I/O_EXPANDER_2.SCL I/O_EXPANDER_3.SCL I/O_EXPANDER_4.SCL I/O_EXPANDER_6.SCL U$21.P$1
SDA: ESP32-POE-ISO.13 I/O_EXPANDER.SDA I/O_EXPANDER_1.SDA I/O_EXPANDER_2.SDA I/O_EXPANDER_3.SDA I/O_EXPANDER_4.SDA I/O_EXPANDER_6.SDA U$24.P$1

## Tracks (layer width: path | path; a pad name or v marks a point on that pad's centre or on a via)
+3V3  (via drill 0.35)
  Top 0.305: v59.5,71.5 59.5,107 57,109.5 57,110.5 58.5,112 | 58.5,112 61,114.5 U$6.P$1 | 28.5,175 28.5,164.5 27,163 RJ45_2X4_MODULE.UP4-3 | 28.5,175 27,176.5 RJ45_2X4_MODULE.UP3-3 | 28.5,189 27,190.5 RJ45_2X4_MODULE.UP2-3 | 28.5,175 28.5,182 | 28.5,182 28.5,189 | 28.5,189 28.5,199 | 28.5,199 28.5,203 27,204.5 RJ45_2X4_MODULE.UP1-3 | 15.5,178.5 15.5,167 17,167 RJ45_2X4_MODULE.LP4-3 | 15.5,178.5 17,180 17,180.5 RJ45_2X4_MODULE.LP3-3 | 15.5,193 17,194.5 RJ45_2X4_MODULE.LP2-3 17.5,194.5 17.5,194 19,192.5 19,192 20.5,192 22.5,194 22.5,198 23,198.5 23,199 28.5,199 | 15.5,178.5 15.5,193 | 15.5,193 15.5,207 17,208.5 RJ45_2X4_MODULE.LP1-3 | 58.5,112 56.5,114 56.5,114.5 53,118 53,121 51,123 51,155.5 32.5,174 32.5,178 28.5,182
  Bottom 0.305: v59.5,71.5 59,71 57,71 ESP32-POE-ISO.3V3
+5V  (via drill 0.35)
  Top 0.305: 60,171 60.5,171 60.5,173.5 I/O_EXPANDER_1.VCC 61,174 61,174.5 61.5,175 61.5,176 76.5,176 77.5,175 77.5,174.5 78,174 I/O_EXPANDER_4.VCC 78.5,174 78.5,174.5 83,179 83,196.5 91,204.5 RELAY_1.DC+ | 60,171 51.91,171 49.28,173.63 43.65,173.63 43.63,173.62 I/O_EXPANDER_2.VCC | v21.5,164 21.5,159.5 20,158 20,157 7,144 7,141.5 4,141.5 I/O_EXPANDER_3.VCC | v21.5,164 20,165.5 RJ45_2X4_MODULE.LP4-4 | 21.5,177.5 20,179 RJ45_2X4_MODULE.LP3-4 | v21.5,164 21.5,177.5 | 21.5,177.5 21.5,190 23.5,192 RJ45_2X4_MODULE.UP2-4 | RJ45_2X4_MODULE.UP1-4 23.5,205.5 22,204 22,198.5 21.5,198 21.5,194.5 20,193 RJ45_2X4_MODULE.LP2-4 | 56.5,96.5 56.5,105.5 v53.5,108.5 | 56.5,96.5 56.5,73.5 ESP32-POE-ISO.5V | 59.5,121 59,120.5 59,115 U$2.P$1 | 59.5,121 60.5,122 60.5,123.5 I/O_EXPANDER.VCC 60.5,124 60.5,124.5 60,125 60,171 | I/O_EXPANDER_6.VCC 78.36,122.09 77.27,121 59.5,121 | v60.5,72 60.5,27 49,15.5 RELAY_2.DC+ | 56.5,96.5 v57,96.5
  Bottom 0.305: RJ45_2X4_MODULE.LP1-4 20,207 21,206 23.5,206 RJ45_2X4_MODULE.UP1-4 | RJ45_2X4_MODULE.LP2-4 20,193 20.5,192.5 23.5,192.5 RJ45_2X4_MODULE.UP2-4 | RJ45_2X4_MODULE.LP3-4 20,179 22,179 23,178 23.5,178 RJ45_2X4_MODULE.UP3-4 24,178 27.5,178 34.5,171 43,171 43,173.5 I/O_EXPANDER_2.VCC | v21.5,164 23.5,164 RJ45_2X4_MODULE.UP4-4 | 53.5,111.5 55.5,111.5 58.5,114.5 U$2.P$1 | 53.5,111.5 41.5,111.5 39.7,113.3 38.46,113.3 38.45,113.32 U$26.VCC | 53.5,111.5 v53.5,108.5 | v60.5,72 59.5,73 57,73 ESP32-POE-ISO.5V | v57,96.5 62.5,91 90,91 91,90 RELAY_3.DC+
GND  (via drill 0.35)
  other vias: 73.5,43 57.5,47 70,180 70,185 70,190 70,195 70,200 70,205 70,210 70,215 25,132.5 25,127.5 25,122.5 25,117.5 25,112.5 25,107.5 25,102.5 102.5,117.5 107.5,117.5 112.5,117.5 117.5,117.5 122.5,117.5 127.5,117.5 77.5,40 77.5,35 77.5,30 77.5,25 77.5,20 77.5,15 77.5,10 77.5,5
  pour Top: -10,230 -10,-10 150,-10 150,230
  pour Bottom: -10,230 150,230 150,-10 -10,-10
GND1  (via drill 0.35)
  other vias: 96.29,162.98 112.56,161.22 118.25,163.25 118.25,160.75 118.25,158.25 118.25,155.75 118.25,153.25 108.25,153.25 109.75,153.25 109.75,151.75 108.25,151.75 115.75,175.25 115.75,173.75 117.25,175.25 117.25,173.75 92.75,175.25 92.75,173.75 94.25,175.25 94.25,173.75 96.5,169.5 96.5,168 96.5,171 96.5,172.5 107.25,141.75 107.25,140.25 107.25,138.75 105.75,138.75 105.75,140.25
  pour Top: 87,177.5 87,126.5 121,126.5 121,177.5
  pour Bottom: 87,177.5 87,126.5 121,126.5 121,177.5
GND2  (via drill 0.35)
  other vias: 28.29,78.48 44.56,76.72 50.25,78.75 50.25,76.25 50.25,73.75 50.25,71.25 50.25,68.75 40.25,68.75 41.75,68.75 41.75,67.25 40.25,67.25 47.75,90.75 47.75,89.25 49.25,90.75 49.25,89.25 24.75,90.75 24.75,89.25 26.25,90.75 26.25,89.25 28.5,85 28.5,83.5 28.5,86.5 28.5,88 39.25,57.25 39.25,55.75 39.25,54.25 37.75,54.25 37.75,55.75
  pour Top: 19,93 19,42 53,42 53,93
  pour Bottom: 19,93 19,42 53,42 53,93
GND3  (via drill 0.35)
  other vias: 95.79,48.98 112.06,47.22 117.75,49.25 117.75,46.75 117.75,44.25 117.75,41.75 117.75,39.25 107.75,39.25 109.25,39.25 109.25,37.75 107.75,37.75 115.25,61.25 115.25,59.75 116.75,61.25 116.75,59.75 92.25,61.25 92.25,59.75 93.75,61.25 93.75,59.75 96,55.5 96,54 96,57 96,58.5 106.75,27.75 106.75,26.25 106.75,24.75 105.25,24.75 105.25,26.25
  pour Top: 86.5,63.5 86.5,12.5 120.5,12.5 120.5,63.5
  pour Bottom: 86.5,63.5 86.5,12.5 120.5,12.5 120.5,63.5
N$1
  Bottom 0.152: I/O_EXPANDER_1.P0 63,200 63,206.08 61.83,207.25 RJ45_2X4_MODULE.UP1-5
N$2
  Bottom 0.152: I/O_EXPANDER_1.P1 63,197.5 61.5,197.5 53,206 26,206 23.5,208.5 RJ45_2X4_MODULE.UP1-6
N$3  (via drill 0.35)
  Top 0.152: v33,204 27,210 RJ45_2X4_MODULE.UP1-7
  Bottom 0.152: v33,204 52.5,204 61.5,195 63,195 I/O_EXPANDER_1.P2
N$4  (via drill 0.35)
  Top 0.152: v83,89.5 83.5,90 83.5,111 81.5,113 66.5,113 66.5,114.5 U$8.P$1
  Bottom 0.152: v83,89.5 62,68.5 61,68.5 58.5,66 57,66 ESP32-POE-ISO.ESP_EN
N$5  (via drill 0.35)
  Top 0.152: v83,75 85,77 84,78 84,111.5 82,113.5 70,113.5 70,114 69,115 U$9.P$1
  Bottom 0.152: v83,75 82.5,75 75,67.5 62.5,67.5 58.5,63.5 57,63.5 ESP32-POE-ISO.0
N$6  (via drill 0.35)
  Top 0.152: v85.5,77.5 84.5,78.5 84.5,114.5 v81,118 | v74.5,118 72,115.5 72,115 U$10.P$1
  Bottom 0.152: v85.5,77.5 84,76 82.5,76 74.5,68 62,68 58.5,64.5 55,64.5 55,62.5 56.5,61 ESP32-POE-ISO.1 | v74.5,118 v81,118
N$7  (via drill 0.35)
  Top 0.152: v66,65.5 67,66.5 v67,93.5
  Bottom 0.152: v66,65.5 65.5,65.5 58.5,58.5 57,58.5 ESP32-POE-ISO.2 | v67,93.5 83.5,110 83.5,113 76,113 74.5,114.5 U$11.P$1 74,115 72,117 58.5,117 58,116.5 45.5,116.5 38.5,123.5 U$26.MOSI
N$8  (via drill 0.35)
  Top 0.152: v85,59.5 85,65 87,67 87,99.5 85,101.5 85,115 81,119 77.86,119 76.6,117.74 U$12.P$1
  Bottom 0.152: v85,59.5 61,59.5 57,55.5 ESP32-POE-ISO.3
N$9  (via drill 0.35)
  Top 0.152: v61.5,98 v61.5,57.5 | v54.5,104.5 46,113 46,113.5 v50,117.5
  Bottom 0.152: v61.5,57.5 57,53 ESP32-POE-ISO.4 | v61.5,98 55,104.5 v54.5,104.5 | v50,117.5 74,117.5 74.5,117 77,117 79,115 U$13.P$1
N$10  (via drill 0.35)
  Top 0.152: v66,58.5 68,60.5 v68,93 | v40.5,109.5 41,110 41,118 40.58,118.42 U$26.CS
  Bottom 0.152: v66,58.5 65,58.5 57,50.5 ESP32-POE-ISO.5 | U$14.P$1 82,114.5 83,113.5 84,113.5 84,109 v68,93 67,92 66.5,92 59.5,99 51,99 v40.5,109.5
N$11
  Top 0.152: ESP32-POE-ISO.39 82.5,73.5 82,74 82,110 U$15.P$1
N$12
  Top 0.152: ESP32-POE-ISO.36 82.5,71 79.5,74 79.5,110 U$16.P$1
N$13
  Top 0.152: ESP32-POE-ISO.35 82.5,68.5 76.5,74.5 76.5,110 U$17.P$1
N$14
  Top 0.152: ESP32-POE-ISO.34 82.5,66 74.5,74 74.5,110 U$18.P$1
N$15
  Top 0.152: ESP32-POE-ISO.33 82.5,63.5 74,72 74,106.5 71.5,109 71.5,110 U$19.P$1
N$16  (via drill 0.35)
  Top 0.152: v76,67 73,70 73,105 69,109 69,110 U$20.P$1
  Bottom 0.152: v76,67 76.5,67 82.5,61 ESP32-POE-ISO.32
N$17  (via drill 0.35)
  Top 0.152: I/O_EXPANDER_1.P3 61.49,192.01 v42,211.5
  Bottom 0.152: v42,211.5 24,211.5 RJ45_2X4_MODULE.UP1-8
N$18  (via drill 0.35)
  Top 0.152: SJ1.2 50,113 54.5,108.5 v55.5,108.5 55.5,112 54.5,113 4K7.2 | v69.5,58.5 69,59 69,104 64,109 | 64,109 64,110 U$22.P$1 | v59.5,108.5 63.5,108.5 64,109
  Bottom 0.152: v69.5,58.5 79.5,58.5 82.5,55.5 ESP32-POE-ISO.15 | v59.5,108.5 v55.5,108.5
N$19  (via drill 0.35)
  Top 0.152: v70.5,108.5 73.5,105.5 73.5,70.5 77.5,66.5 77.5,59.5 84,59.5 85,58.5 85,55 83,53 ESP32-POE-ISO.14
  Bottom 0.152: U$23.P$1 61.5,110 63,108.5 v70.5,108.5 65,103 62.5,105.5 45.5,105.5 39,112 36.45,112 36,112.45 36,124 38,126 U$26.SCK
N$20  (via drill 0.35)
  Top 0.152: v30.5,195 30.5,199.5 45.5,199.5 I/O_EXPANDER_2.P0
  Bottom 0.152: v30.5,195 28.5,193 27,193 RJ45_2X4_MODULE.UP2-5
N$21
  Bottom 0.152: I/O_EXPANDER_4.P0 81,199.5 91,199.5 RELAY_1.CH1
N$22
  Bottom 0.152: I/O_EXPANDER_4.P1 81,197 91,197 RELAY_1.CH2
N$23
  Bottom 0.152: I/O_EXPANDER_4.P2 81,194.5 91,194.5 RELAY_1.CH3
N$24
  Bottom 0.152: I/O_EXPANDER_4.P3 80.69,192.11 91.22,192.11 RELAY_1.CH4
N$25
  Bottom 0.152: I/O_EXPANDER_4.P4 91.48,189.48 91.5,189.5 RELAY_1.CH5
N$26
  Bottom 0.152: I/O_EXPANDER_2.P1 45.5,197 26,197 24.5,195.5 24.5,194.5 24,194.5 RJ45_2X4_MODULE.UP2-6
N$27
  Bottom 0.152: I/O_EXPANDER_4.P5 81,187 91,187 RELAY_1.CH6
N$28
  Bottom 0.152: RELAY_1.CH7 91.19,184.43 80.68,184.43 I/O_EXPANDER_4.P6
N$29
  Bottom 0.152: I/O_EXPANDER_4.P7 80.83,181.94 91.25,181.94 RELAY_1.CH8
N$30
  Top 0.152: I/O_EXPANDER_6.P0 81,149.5 84.5,146 84.5,117.5 90,112 90,91 89.5,90.5 89.5,86 91,84.5 RELAY_3.CH1
N$31  (via drill 0.35)
  Top 0.152: v83.5,118.5 83.5,144.5 81,147 I/O_EXPANDER_6.P1 | v92,107.5 92.5,107 92.5,91 93,90.5 93,83.5 91.5,82 RELAY_3.CH2
  Bottom 0.152: v83.5,118.5 83.5,115 84.5,115 v92,107.5
N$32  (via drill 0.35)
  Top 0.152: v84.5,147 85,146.5 85,124.5 93,116.5 93,91.5 93.5,91 93.5,81.5 91.5,79.5 RELAY_3.CH3
  Bottom 0.152: v84.5,147 83,147 81,145 I/O_EXPANDER_6.P2
N$33  (via drill 0.35)
  Top 0.152: v82.5,123 83,123.5 83,140.5 82,141.5 81,141.5 I/O_EXPANDER_6.P3 | v94,115.5 94,79.5 91.5,77 RELAY_3.CH4
  Bottom 0.152: v82.5,123 85,120.5 89,120.5 v94,115.5
N$34  (via drill 0.35)
  Top 0.152: v82,124.5 82.5,125 82.5,137.5 81,139 I/O_EXPANDER_6.P4 | v88.5,122 95,115.5 95,103.5 94.5,103 94.5,77.5 91.5,74.5 RELAY_3.CH5
  Bottom 0.152: v82,124.5 84.5,122 v88.5,122
N$35  (via drill 0.35)
  Top 0.152: v80,120 80,125 78,127 78,137 80.5,137 I/O_EXPANDER_6.P5 | v95.5,103 95,102.5 95,75.5 91.5,72 RELAY_3.CH6
  Bottom 0.152: v80,120 83,117 83,114.5 84,114.5 v95.5,103
N$36
  Bottom 0.152: I/O_EXPANDER_6.P6 81,134 84.5,130.5 84.5,125 85.5,125 86.5,124 90.5,124 97.5,117 97.5,70 92.5,70 92,69.5 91.5,69.5 RELAY_3.CH7
N$37  (via drill 0.35)
  Top 0.152: v96.5,117 96.5,72 91.5,67 RELAY_3.CH8
  Bottom 0.152: v96.5,117 90,123.5 86,123.5 85,124.5 84,124.5 84,128.5 81,131.5 I/O_EXPANDER_6.P7
N$38  (via drill 0.35)
  Top 0.152: v71.5,46.5 v71.5,70
  Bottom 0.152: v71.5,70 85,83.5 97,83.5 97,115.5 89.5,123 84.5,123 81.5,126 78,126 78,135 63.5,149.5 I/O_EXPANDER.P0 | v71.5,46.5 50.5,25.5 50.5,21 50,20.5 49,20.5 RELAY_2.CH1
N$39  (via drill 0.35)
  Top 0.152: v46,130 41.5,125.5 41.5,105 51,95.5 55.5,95.5 55.5,75 55,74.5 55,49.5 55.5,49 v55.5,42 | v56.5,41 50.5,35 50.5,24 49,22.5 RELAY_2.CH2
  Bottom 0.152: v46,130 63,147 I/O_EXPANDER.P1 | v56.5,41 v55.5,42
N$40  (via drill 0.35)
  Top 0.152: v71.5,92 70.5,91 v70.5,46.5
  Bottom 0.152: v71.5,92 96.5,92 96.5,104.5 85,116 85,119.5 79,125.5 77.5,125.5 77.5,130.5 63.5,144.5 I/O_EXPANDER.P2 | v70.5,46.5 49.5,25.5 49,25.5 RELAY_2.CH3
N$41  (via drill 0.35)
  Top 0.152: v50,130 42,122 42,105.5 v49,98.5 | v63.5,89 64.5,88 v64.5,43.5
  Bottom 0.152: v50,130 51.5,130 63,141.5 I/O_EXPANDER.P3 | v49,98.5 54,98.5 v63.5,89 | v64.5,43.5 49.5,28.5 49.5,28 49,28 RELAY_2.CH4
N$42  (via drill 0.35)
  Top 0.152: v50,129 42.5,121.5 42.5,106 v51,97.5 | v63.5,44 v63.5,88
  Bottom 0.152: v50,129 53,129 63,139 I/O_EXPANDER.P4 | v51,97.5 54,97.5 v63.5,88 | v63.5,44 51,31.5 49.5,31.5 48.5,30.5 RELAY_2.CH5
N$43  (via drill 0.35)
  Top 0.152: v50,128 45,123 45,104.5 v53,96.5 | v59,69 59.5,68.5 59.5,45 v57.5,43
  Bottom 0.152: v50,128 54.5,128 63,136.5 I/O_EXPANDER.P5 | v53,96.5 57,92.5 57,75 58.5,75 61.5,72 61.5,69 v59,69 | v57.5,43 57.5,40 54.5,40 54,39.5 48,39.5 47,38.5 47,35 49,33 RELAY_2.CH6
N$44  (via drill 0.35)
  Top 0.152: v50,127 45.5,122.5 45.5,105 v54,96.5 | v62.5,44 v62.5,88
  Bottom 0.152: v50,127 56,127 63,134 I/O_EXPANDER.P6 | v62.5,88 v54,96.5 | v62.5,44 53,34.5 49.5,34.5 48.5,35.5 RELAY_2.CH7
N$45  (via drill 0.35)
  Top 0.152: v58.5,127 57,125.5 v57,115.5 | v55.5,114 56.5,113 56.5,106.5 59,104 59,72 58.5,71.5 60,70 60,44.5 57.5,42 56.5,42 51.5,37 49.5,37 49,37.5 49,38 RELAY_2.CH8
  Bottom 0.152: v58.5,127 63,131.5 I/O_EXPANDER.P7 | v55.5,114 v57,115.5
N$46
  Top 0.152: RJ45_2X4_MODULE.LP1-5 17.5,205.5 18.5,206.5 18.5,210 21.5,213 37.5,213 61.03,189.47 I/O_EXPANDER_1.P4
N$47
  Bottom 0.152: I/O_EXPANDER_1.P5 63,187 48.5,201.5 28.5,201.5 27.5,200.5 24.5,200.5 20.5,204.5 20,204.5 RJ45_2X4_MODULE.LP1-6
N$48
  Bottom 0.152: I/O_EXPANDER_1.P6 63,184.5 46.5,201 29,201 28,200 20,200 17,203 RJ45_2X4_MODULE.LP1-7
N$49
  Top 0.152: I/O_EXPANDER_1.P7 63,182 51.18,182 48,185.18 48,199.5 35,212.5 23,212.5 21.5,211 21.5,203.5 20,202 RJ45_2X4_MODULE.LP1-8
N$50
  Bottom 0.152: I/O_EXPANDER_2.P2 45.5,195 44.5,196 27,196 RJ45_2X4_MODULE.UP2-7
N$51  (via drill 0.35)
  Top 0.152: I/O_EXPANDER_2.P3 45.5,192 30.5,192 29.5,193 v29.5,198
  Bottom 0.152: v29.5,198 25,198 24.5,197.5 24,197.5 RJ45_2X4_MODULE.UP2-8
N$52
  Bottom 0.152: I/O_EXPANDER_2.P4 45.5,189 44.5,188 28.5,188 27.5,187 24,187 21.5,189.5 21.5,191.5 21,192 RJ45_2X4_MODULE.LP2-5
N$53
  Bottom 0.152: I/O_EXPANDER_2.P5 45.5,187 28.5,187 28,186.5 23.5,186.5 21,189 21,190 20.5,190.5 20,190.5 RJ45_2X4_MODULE.LP2-6
N$54  (via drill 0.35)
  Top 0.152: v30,184.5 45.5,184.5 I/O_EXPANDER_2.P6
  Bottom 0.152: v30,184.5 29,185.5 20.5,185.5 17,189 RJ45_2X4_MODULE.LP2-7
N$55
  Bottom 0.152: I/O_EXPANDER_2.P7 45.5,182 41.5,186 22.5,186 20.5,188 20,188 RJ45_2X4_MODULE.LP2-8
N$56  (via drill 0.35)
  Top 0.152: v47,113.5 48,113.5 SJ1.1
  Bottom 0.152: 4K7.1 44,113.5 v47,113.5 40,120.5 38.5,120.5 U$26.MISO
N$57  (via drill 0.35)
  Top 0.152: v30,177 30,139 I/O_EXPANDER_3.P0
  Bottom 0.152: v30,177 27.5,179.5 27,179.5 RJ45_2X4_MODULE.UP3-5
N$58
  Top 0.152: U$26.CL 9.5,120 5.5,124 5.5,136 1,140.5 1,153.5 11,163.5 17.5,163.5 17.5,164 RJ45_2X4_MODULE.LP4-5
  Bottom 0.152: RJ45_2X4_MODULE.UP4-5 26.5,165.5 22,165.5 20.5,164 17.5,164 RJ45_2X4_MODULE.LP4-5
N$59  (via drill 0.35)
  Top 0.152: I/O_EXPANDER_3.P1 27.03,137.53 28.06,136.5 29.91,136.5 31.49,138.08 31.5,138.07 v31.5,176.5
  Bottom 0.152: v31.5,176.5 27.5,180.5 24,180.5 RJ45_2X4_MODULE.UP3-6
N$60  (via drill 0.35)
  Top 0.152: v29.5,179.5 29,179 29,143.5 24.5,139 I/O_EXPANDER_3.P2
  Bottom 0.152: v29.5,179.5 27.5,181.5 27,181.5 RJ45_2X4_MODULE.UP3-7
N$61
  Top 0.152: I/O_EXPANDER_3.P3 22,139 25,142 25,161 25.5,161.5 25.5,162 25,162.5 25,163.5 25.5,164 25.5,164.5 25,165 25,166 25.5,166.5 25.5,167 25,167.5 25,168.5 25.5,169 25.5,171.5 22.5,174.5 22.5,181.5 23.5,182.5 24,182.5 24,183 RJ45_2X4_MODULE.UP3-8
N$62
  Bottom 0.152: I/O_EXPANDER_3.P4 19.5,139 19.5,158.5 18.25,159.75 16.75,159.75 15.5,161 15.5,170 18,172.5 20.5,172.5 21.5,173.5 21.5,174.5 20.5,175.5 19,175.5 17.38,177.12 RJ45_2X4_MODULE.LP3-5
N$63  (via drill 0.35)
  Top 0.152: v18.5,158 18.5,168.5 21,171 21,176 20,177 RJ45_2X4_MODULE.LP3-6
  Bottom 0.152: v18.5,158 18.5,155.5 17,154 17,139 I/O_EXPANDER_3.P5
N$64
  Bottom 0.152: I/O_EXPANDER_3.P6 14,138.5 12.5,137 11,137 10.5,137.5 10.5,154 14.5,158 14.5,174.5 15.49,175.5 RJ45_2X4_MODULE.LP3-7
N$65
  Bottom 0.152: I/O_EXPANDER_3.P7 12,139 12,154 15,157 15,173 16.21,174.21 19.89,174.21 RJ45_2X4_MODULE.LP3-8
N$66
  Bottom 0.305: U$34.P$1 100,129.25 102.75,132 102.75,150.91 109.48,157.64 111.92,157.64 114.31,160.03 114.31,163.44 110.5,167.25 108.75,167.25 107.25,165.75 107.25,165 RJ45.3
N$67
  Top 0.152: U$43.P$1 99.75,150.75 97.75,152.75 97.75,163.7 99.04,164.99 RJ45.7
N$68
  Top 0.152: U$44.P$1 111.66,149.57 113.03,150.94 113.03,157.27 111.86,158.44 104.81,158.44 101,162.25 RJ45.8
N$69  (via drill 0.35)
  Top 0.152: v33.5,162 35,160.5 U$1.P$1
  Bottom 0.152: v33.5,162 32.5,162 27,167.5 RJ45_2X4_MODULE.UP4-7
N$70  (via drill 0.35)
  Top 0.152: v35,163 37.5,160.5 U$4.P$1
  Bottom 0.152: v35,163 29,169 24,169 RJ45_2X4_MODULE.UP4-8
N$71
  Bottom 0.152: RJ45_2X4_MODULE.LP4-7 17.5,161.5 21.5,161.5 24,159 31.5,159 34.5,162 38.5,162 40,160.5 U$5.P$1
N$72
  Bottom 0.152: RJ45_2X4_MODULE.LP4-8 20,160 21.5,158.5 41,158.5 42.5,160 U$25.P$1
N$73  (via drill 0.35)
  Top 0.152: U$26.CH 9.5,122.5 7.5,124.5 7.5,143.5 20.5,156.5 20.5,157.5 22.5,159.5 v22.5,163 22.5,165 23.5,166 24,166 24,166.5 RJ45_2X4_MODULE.UP4-6
  Bottom 0.152: v22.5,163 20,163 RJ45_2X4_MODULE.LP4-6
N$74
  Bottom 0.152: ESP8266D1MINI.RESET 94.75,148.25 97.25,148.25 98.5,147 99.75,147 U$3.P$1
N$75
  Bottom 0.152: ESP8266D1MINI.A0 94.75,145.75 97,145.75 98.5,144.25 99.75,144.25 U$27.P$1
N$76
  Bottom 0.152: ESP8266D1MINI.D0 94.75,143.25 97,143.25 98.5,141.75 99.75,141.75 U$28.P$1
N$77  (via drill 0.35)
  Top 0.152: U$31.SCK 93.89,171.9 95.08,170.72 95.08,159.68 v95.75,159
  Bottom 0.152: v95.75,159 97.75,157 97.75,152.25 96.75,151.25 92.75,151.25 91,149.5 91,143.25 93.25,141 | 93.25,141 93.5,140.75 94.5,140.75 ESP8266D1MINI.D5 93.25,141 | 93.25,141 96.5,141 98,139.5 99.75,139.5 U$29.P$1
N$78
  Top 0.152: 4K1.2 110.5,155.75 106.25,155.75 SJ2.2 106.25,155.5 106.5,155.25 106.5,143.5 99.75,136.75 U$30.P$1
  Bottom 0.152: ESP8266D1MINI.D6 94.75,138 97,138 98,137 99.75,137 U$30.P$1
N$79  (via drill 0.35)
  Top 0.152: v96.25,152.5 94,154.75 94,168.5 93.14,169.36 U$31.MOSI
  Bottom 0.152: v96.25,152.5 96.21,152.46 92.46,152.46 90,150 90,139.25 93.5,135.75 94.5,135.75 ESP8266D1MINI.D7 94.75,135.75 96.5,135.75 97.75,134.5 99.75,134.5 U$32.P$1
N$80
  Top 0.152: U$31.CS 91.81,164.28 93,163.09 93,151.5 91,149.5 91,134.5 92.75,132.75 94.5,132.75 94.5,133 ESP8266D1MINI.D8
  Bottom 0.152: U$33.P$1 99.75,132 97.75,132 96.5,133.25 94.75,133.25 ESP8266D1MINI.D8
N$81
  Bottom 0.152: ESP8266D1MINI.D4 112.5,135.66 U$40.P$1
N$82
  Bottom 0.152: ESP8266D1MINI.D3 112.51,138.2 U$39.P$1
N$83
  Bottom 0.152: U$38.P$1 112.51,140.74 ESP8266D1MINI.D2
N$84
  Bottom 0.152: U$37.P$1 112.51,143.28 ESP8266D1MINI.D1
N$85
  Bottom 0.152: U$36.P$1 112.51,145.82 ESP8266D1MINI.RX
N$86
  Bottom 0.152: ESP8266D1MINI.TX 112.51,148.36 U$35.P$1
N$87  (via drill 0.35)
  Top 0.305: v104.5,150.75 102.5,152.75 v102.5,154
  Bottom 0.305: ESP8266D1MINI.5V 117.25,130.5 115.75,130.5 114.5,129.25 U$42.P$1 110.25,129.25 104,135.5 104,150.25 v104.5,150.75 | 103,159.75 104.5,159.75 105.89,161.15 105.89,162.39 RJ45.4 | 103,159.75 99.75,159.75 98.75,160.75 92.25,160.75 90.75,159.25 89.75,159.25 U$31.VCC | v102.5,154 103,154.5 103,159.75
N$88
  Bottom 0.152: U$31.CL 118,165.75 113.5,165.75 111,168.25 108,168.25 104.75,165 RJ45.5
N$89
  Top 0.152: RJ45.6 103.5,162.25 106,159.75 108.75,159.75 112.46,163.46 112.46,166.42 114.1,168.06 U$31.CH
N$90  (via drill 0.35)
  Top 0.152: SJ2.1 104.5,155.75 100.5,155.75 4K1.1 100.25,155.75 100.25,156.5 98.75,158 98.75,163 v99.25,163.5
  Bottom 0.152: v99.25,163.5 97.5,163.5 94.25,166.75 89.75,166.75 U$31.MISO
N$91
  Bottom 0.305: U$53.P$1 32,44.75 34.75,47.5 34.75,66.41 41.48,73.14 43.92,73.14 46.31,75.53 46.31,78.94 42.5,82.75 40.75,82.75 39.25,81.25 39.25,80.5 RJ1.3
N$92
  Top 0.152: U$62.P$1 31.75,66.25 29.75,68.25 29.75,79.2 31.04,80.49 RJ1.7
N$93
  Top 0.152: U$63.P$1 43.66,65.07 45.03,66.44 45.03,72.77 43.87,73.94 36.81,73.94 33,77.75 RJ1.8
N$94
  Bottom 0.152: ESP8266D1MINI1.RESET 26.75,63.75 29.25,63.75 30.5,62.5 31.75,62.5 U$46.P$1
N$95
  Bottom 0.152: ESP8266D1MINI1.A0 26.75,61.25 29,61.25 30.5,59.75 31.75,59.75 U$47.P$1
N$96
  Bottom 0.152: ESP8266D1MINI1.D0 26.75,58.75 29,58.75 30.5,57.25 31.75,57.25 U$48.P$1
N$97  (via drill 0.35)
  Top 0.152: U$45.SCK 25.89,87.4 27.07,86.22 27.07,75.17 v27.75,74.5
  Bottom 0.152: v27.75,74.5 29.75,72.5 29.75,67.75 28.75,66.75 24.75,66.75 23,65 23,58.75 25.25,56.5 | 25.25,56.5 25.5,56.25 26.5,56.25 ESP8266D1MINI1.D5 25.25,56.5 | 25.25,56.5 28.5,56.5 30,55 31.75,55 U$49.P$1
N$98
  Top 0.152: 4K2.2 42.5,71.25 38.25,71.25 SJ3.2 38.25,71 38.5,70.75 38.5,59 31.75,52.25 U$50.P$1
  Bottom 0.152: ESP8266D1MINI1.D6 26.75,53.5 29,53.5 30,52.5 31.75,52.5 U$50.P$1
N$99  (via drill 0.35)
  Top 0.152: v28.25,68 26,70.25 26,84 25.14,84.86 U$45.MOSI
  Bottom 0.152: v28.25,68 28.21,67.96 24.46,67.96 22,65.5 22,54.75 25.5,51.25 26.5,51.25 ESP8266D1MINI1.D7 26.75,51.25 28.5,51.25 29.75,50 31.75,50 U$51.P$1
N$100
  Top 0.152: U$45.CS 23.81,79.78 25,78.59 25,67 23,65 23,50 24.75,48.25 26.5,48.25 26.5,48.5 ESP8266D1MINI1.D8
  Bottom 0.152: U$52.P$1 31.75,47.5 29.75,47.5 28.5,48.75 26.75,48.75 ESP8266D1MINI1.D8
N$101
  Bottom 0.152: ESP8266D1MINI1.D4 44.5,51.16 U$59.P$1
N$102
  Bottom 0.152: ESP8266D1MINI1.D3 44.51,53.7 U$58.P$1
N$103
  Bottom 0.152: U$57.P$1 44.51,56.24 ESP8266D1MINI1.D2
N$104
  Bottom 0.152: U$56.P$1 44.51,58.78 ESP8266D1MINI1.D1
N$105
  Bottom 0.152: U$55.P$1 44.51,61.32 ESP8266D1MINI1.RX
N$106
  Bottom 0.152: ESP8266D1MINI1.TX 44.51,63.86 U$54.P$1
N$107  (via drill 0.35)
  Top 0.305: v36.5,66.25 34.5,68.25 v34.5,69.5
  Bottom 0.305: ESP8266D1MINI1.5V 49.25,46 47.75,46 46.5,44.75 U$61.P$1 42.25,44.75 36,51 36,65.75 v36.5,66.25 | 35,75.25 36.5,75.25 37.9,76.64 37.9,77.89 RJ1.4 | 35,75.25 31.75,75.25 30.75,76.25 24.25,76.25 22.75,74.75 21.75,74.75 U$45.VCC | v34.5,69.5 35,70 35,75.25
N$108
  Bottom 0.152: U$45.CL 50,81.25 45.5,81.25 43,83.75 40,83.75 36.75,80.5 RJ1.5
N$109
  Top 0.152: RJ1.6 35.5,77.75 38,75.25 40.75,75.25 44.46,78.96 44.46,81.92 46.1,83.56 U$45.CH
N$110  (via drill 0.35)
  Top 0.152: SJ3.1 36.5,71.25 32.5,71.25 4K2.1 32.25,71.25 32.25,72 30.75,73.5 30.75,78.5 v31.25,79
  Bottom 0.152: v31.25,79 29.5,79 26.25,82.25 21.75,82.25 U$45.MISO
N$111
  Top 1: U$64.P$11 R18.2 SJ21.2
  Bottom 1: U$64.P$11 R18.2
N$112
  Top 1: U$64.P$3 R19.2 SJ22.2
  Bottom 1: U$64.P$3 R19.2
N$113
  Top 1: U$64.P$4 R20.2 SJ23.2
  Bottom 1: U$64.P$4 R20.2
N$114
  Top 1: U$64.P$14 R21.2 SJ10.2
  Bottom 1: U$64.P$14 R21.2
N$115
  Top 1: SJ24.2 R22.2 U$64.P$6
  Bottom 1: U$64.P$6 R22.2
N$116
  Top 1: U$64.P$16 R23.2 SJ17.2
  Bottom 1: U$64.P$16 R23.2
N$117
  Top 1: SJ19.2 R24.2 U$64.P$17
  Bottom 1: U$64.P$17 R24.2
N$118
  Top 1: SJ20.1 R11.1 | SJ21.1 R18.1 | SJ22.1 R19.1 | R20.1 SJ23.1 | R21.1 SJ10.1 | R22.1 SJ24.1 | SJ17.1 R23.1 | SJ19.1 R24.1
  Top 3: R11.1 137.3,126.36 137.3,136.44 R18.1 137.3,138.36 137.3,148.44 R19.1 137.3,150.36 137.3,160.44 R20.1 | R21.1 136.34,173.44 137.3,174.4 137.3,184.44 R22.1 137.3,186.36 137.3,196.44 R23.1 136.34,197.44 137.3,198.4 137.3,208.44 R24.1 | 137.2,162.26 R20.1 | 137.2,172.54 R21.1 | R21.1 137.3,172.44 137.3,167.64 U$64.P$18 137.3,167.14 137.3,162.36 R20.1
  Bottom 3: R11.1 137.3,126.36 137.3,136.44 R18.1 136.34,137.44 137.3,138.4 137.3,148.44 R19.1 137.3,150.36 137.3,160.44 R20.1 136.34,161.44 137.3,162.4 137.3,167.6 U$64.P$18 137.3,167.65 137.3,172.44 R21.1 136.34,173.44 137.3,174.4 137.3,184.44 R22.1 136.34,185.44 137.3,186.4 137.3,196.44 R23.1 136.34,197.44 137.3,198.4 137.3,208.44 R24.1
N$119
  Top 1: U$64.P$10 R11.2 SJ20.2
  Bottom 1: U$64.P$10 R11.2
N$120
  Top 1: U$65.P$11 R2.2 SJ8.2
  Bottom 1: U$65.P$11 R2.2
N$121
  Top 1: U$65.P$3 R3.2 SJ9.2
  Bottom 1: U$65.P$3 R3.2
N$122
  Top 1: U$65.P$4 R4.2 SJ11.2
  Bottom 1: U$65.P$4 R4.2
N$123
  Top 1: U$65.P$14 R5.2 SJ4.2
  Bottom 1: U$65.P$14 R5.2
N$124
  Top 1: SJ12.2 R6.2 U$65.P$6
  Bottom 1: U$65.P$6 R6.2
N$125
  Top 1: U$65.P$16 R7.2 SJ5.2
  Bottom 1: U$65.P$16 R7.2
N$126
  Top 1: SJ6.2 R8.2 U$65.P$17
  Bottom 1: U$65.P$17 R8.2
N$127
  Top 1: SJ7.1 R1.1 | SJ8.1 R2.1 | SJ9.1 R3.1 | R4.1 SJ11.1 | R5.1 SJ4.1 | R6.1 SJ12.1 | SJ5.1 R7.1 | SJ6.1 R8.1
  Top 3: R1.1 136.8,11.86 136.8,21.94 R2.1 136.8,23.86 136.8,33.94 R3.1 136.8,35.86 136.8,45.94 R4.1 | R5.1 135.84,58.94 136.8,59.9 136.8,69.94 R6.1 136.8,71.86 136.8,81.94 R7.1 135.84,82.94 136.8,83.9 136.8,93.94 R8.1 | 136.7,47.76 R4.1 | 136.7,58.04 R5.1 | R5.1 136.8,57.94 136.8,53.14 U$65.P$18 136.8,52.64 136.8,47.86 R4.1
  Bottom 3: R1.1 136.8,11.86 136.8,21.94 R2.1 135.84,22.94 136.8,23.9 136.8,33.94 R3.1 136.8,35.86 136.8,45.94 R4.1 135.84,46.94 136.8,47.9 136.8,53.1 U$65.P$18 136.8,53.15 136.8,57.94 R5.1 135.84,58.94 136.8,59.9 136.8,69.94 R6.1 135.84,70.94 136.8,71.9 136.8,81.94 R7.1 135.84,82.94 136.8,83.9 136.8,93.94 R8.1
N$128
  Top 1: U$65.P$10 R1.2 SJ7.2
  Bottom 1: U$65.P$10 R1.2
N$129
  Top 1: U$66.P$11 R10.2 SJ18.2
  Bottom 1: U$66.P$11 R10.2
N$130
  Top 1: U$66.P$3 R12.2 SJ25.2
  Bottom 1: U$66.P$3 R12.2
N$131
  Top 1: U$66.P$4 R13.2 SJ26.2
  Bottom 1: U$66.P$4 R13.2
N$132
  Top 1: U$66.P$14 R14.2 SJ13.2
  Bottom 1: U$66.P$14 R14.2
N$133
  Top 1: SJ27.2 R15.2 U$66.P$6
  Bottom 1: U$66.P$6 R15.2
N$134
  Top 1: U$66.P$16 R16.2 SJ14.2
  Bottom 1: U$66.P$16 R16.2
N$135
  Top 1: SJ15.2 R17.2 U$66.P$17
  Bottom 1: U$66.P$17 R17.2
N$136
  Top 1: SJ16.1 R9.1 | SJ18.1 R10.1 | SJ25.1 R12.1 | R13.1 SJ26.1 | R14.1 SJ13.1 | R15.1 SJ27.1 | SJ14.1 R16.1 | SJ15.1 R17.1
  Top 3: R9.1 2.7,91.64 2.7,81.56 R10.1 2.7,79.64 2.7,69.56 R12.1 2.7,67.64 2.7,57.56 R13.1 | R14.1 3.66,44.56 2.7,43.6 2.7,33.56 R15.1 2.7,31.64 2.7,21.56 R16.1 3.66,20.56 2.7,19.6 2.7,9.56 R17.1 | 2.8,55.74 R13.1 | 2.8,45.46 R14.1 | R14.1 2.7,45.56 2.7,50.36 U$66.P$18 2.7,50.86 2.7,55.64 R13.1
  Bottom 3: R9.1 2.7,91.64 2.7,81.56 R10.1 3.66,80.56 2.7,79.6 2.7,69.56 R12.1 2.7,67.64 2.7,57.56 R13.1 3.66,56.56 2.7,55.6 2.7,50.4 U$66.P$18 2.7,50.35 2.7,45.56 R14.1 3.66,44.56 2.7,43.6 2.7,33.56 R15.1 3.66,32.56 2.7,31.6 2.7,21.56 R16.1 3.66,20.56 2.7,19.6 2.7,9.56 R17.1
N$137
  Top 1: U$66.P$10 R9.2 SJ16.2
  Bottom 1: U$66.P$10 R9.2
N$138
  Bottom 0.305: U$75.P$1 99.5,15.25 102.25,18 102.25,36.91 108.98,43.64 111.42,43.64 113.81,46.03 113.81,49.44 110,53.25 108.25,53.25 106.75,51.75 106.75,51 RJ2.3
N$139
  Top 0.152: U$84.P$1 99.25,36.75 97.25,38.75 97.25,49.7 98.54,50.99 RJ2.7
N$140
  Top 0.152: U$85.P$1 111.16,35.57 112.53,36.94 112.53,43.27 111.36,44.44 104.31,44.44 100.5,48.25 RJ2.8
N$141
  Bottom 0.152: ESP8266D1MINI2.RESET 94.25,34.25 96.75,34.25 98,33 99.25,33 U$68.P$1
N$142
  Bottom 0.152: ESP8266D1MINI2.A0 94.25,31.75 96.5,31.75 98,30.25 99.25,30.25 U$69.P$1
N$143
  Bottom 0.152: ESP8266D1MINI2.D0 94.25,29.25 96.5,29.25 98,27.75 99.25,27.75 U$70.P$1
N$144  (via drill 0.35)
  Top 0.152: U$67.SCK 93.39,57.9 94.58,56.72 94.58,45.67 v95.25,45
  Bottom 0.152: v95.25,45 97.25,43 97.25,38.25 96.25,37.25 92.25,37.25 90.5,35.5 90.5,29.25 92.75,27 | 92.75,27 93,26.75 94,26.75 ESP8266D1MINI2.D5 92.75,27 | 92.75,27 96,27 97.5,25.5 99.25,25.5 U$71.P$1
N$145
  Top 0.152: 4K3.2 110,41.75 105.75,41.75 SJ28.2 105.75,41.5 106,41.25 106,29.5 99.25,22.75 U$72.P$1
  Bottom 0.152: ESP8266D1MINI2.D6 94.25,24 96.5,24 97.5,23 99.25,23 U$72.P$1
N$146  (via drill 0.35)
  Top 0.152: v95.75,38.5 93.5,40.75 93.5,54.5 92.64,55.36 U$67.MOSI
  Bottom 0.152: v95.75,38.5 95.71,38.46 91.96,38.46 89.5,36 89.5,25.25 93,21.75 94,21.75 ESP8266D1MINI2.D7 94.25,21.75 96,21.75 97.25,20.5 99.25,20.5 U$73.P$1
N$147
  Top 0.152: U$67.CS 91.31,50.28 92.5,49.09 92.5,37.5 90.5,35.5 90.5,20.5 92.25,18.75 94,18.75 94,19 ESP8266D1MINI2.D8
  Bottom 0.152: U$74.P$1 99.25,18 97.25,18 96,19.25 94.25,19.25 ESP8266D1MINI2.D8
N$148
  Bottom 0.152: ESP8266D1MINI2.D4 112,21.66 U$81.P$1
N$149
  Bottom 0.152: ESP8266D1MINI2.D3 112.01,24.2 U$80.P$1
N$150
  Bottom 0.152: U$79.P$1 112.01,26.74 ESP8266D1MINI2.D2
N$151
  Bottom 0.152: U$78.P$1 112.01,29.28 ESP8266D1MINI2.D1
N$152
  Bottom 0.152: U$77.P$1 112.01,31.82 ESP8266D1MINI2.RX
N$153
  Bottom 0.152: ESP8266D1MINI2.TX 112.01,34.36 U$76.P$1
N$154  (via drill 0.35)
  Top 0.305: v104,36.75 102,38.75 v102,40
  Bottom 0.305: ESP8266D1MINI2.5V 116.75,16.5 115.25,16.5 114,15.25 U$83.P$1 109.75,15.25 103.5,21.5 103.5,36.25 v104,36.75 | 102.5,45.75 104,45.75 105.39,47.15 105.39,48.39 RJ2.4 | 102.5,45.75 99.25,45.75 98.25,46.75 91.75,46.75 90.25,45.25 89.25,45.25 U$67.VCC | v102,40 102.5,40.5 102.5,45.75
N$155
  Bottom 0.152: U$67.CL 117.5,51.75 113,51.75 110.5,54.25 107.5,54.25 104.25,51 RJ2.5
N$156
  Top 0.152: RJ2.6 103,48.25 105.5,45.75 108.25,45.75 111.96,49.46 111.96,52.42 113.6,54.06 U$67.CH
N$157  (via drill 0.35)
  Top 0.152: SJ28.1 104,41.75 100,41.75 4K3.1 99.75,41.75 99.75,42.5 98.25,44 98.25,49 v98.75,49.5
  Bottom 0.152: v98.75,49.5 97,49.5 93.75,52.75 89.25,52.75 U$67.MISO
SCL  (via drill 0.35)
  Top 0.152: ESP32-POE-ISO.16 82.5,58.5 72.5,58.5 72.5,103 66.5,109 66.5,110 U$21.P$1 | I/O_EXPANDER_6.SCL 71,124 71,173.5 I/O_EXPANDER_4.SCL | v54.5,110.5 52,113 v52,119.5
  Bottom 0.152: 53.5,121 53.5,123.5 I/O_EXPANDER.SCL | 53.5,121 67,121 69.5,123.5 70.5,123.5 I/O_EXPANDER_6.SCL | 34.5,176 35.5,175 35.5,174 I/O_EXPANDER_2.SCL | 34.5,176 25.5,185 4.93,185 3.54,183.61 I/O_EXPANDER_3.SCL | 34.5,176 51,176 53,174 I/O_EXPANDER_1.SCL 53,173.5 55.5,171 71,171 71,173.5 I/O_EXPANDER_4.SCL | v54.5,110.5 55.5,110.5 57,112 64.5,112 66,110.5 U$21.P$1 | 53.5,121 v52,119.5
SDA  (via drill 0.35)
  Top 0.152: ESP32-POE-ISO.13 82.5,50 78.08,45.58 78,45.5 77.12,44.62 67.45,44.62 65,47.06 v65,104 | I/O_EXPANDER_2.SDA 38.5,174 40.5,176 55.04,176 55.04,176.01 55.5,175.54 55.5,174 I/O_EXPANDER_1.SDA | I/O_EXPANDER_4.SDA 73.5,173.5 73.5,124 I/O_EXPANDER_6.SDA | v54.5,109.5 51.5,112.5 51.5,118 50,119.5 v50,125.5
  Bottom 0.152: v65,104 59,110 U$24.P$1 58.5,110 58,109.5 v54.5,109.5 | I/O_EXPANDER_1.SDA 56,174 56,176 71,176 73,174 I/O_EXPANDER_4.SDA | 58,126 56,124 I/O_EXPANDER.SDA | 58,126 72,126 73,125 73,124 I/O_EXPANDER_6.SDA | 58,126 50,126 | 50,126 48.5,126 39.5,135 7.5,135 7.5,142.5 4,146 I/O_EXPANDER_3.SDA | 50,126 v50,125.5

## Text on the board
tPlace: UP4-7 | UP4-8 | LP4-7 | LP4-8 | V2.0 | V2.0 | 5V | 3.3V | GND | EN | 0 | 1 | 2 | 3 | 4 | 5 | 13 | 14 | 15 | 16 | 32 | 33 | 34 | 35 | 36 | 39 | V2.0 | V2.0 | V2.0 | V2.0 | V2.0
bPlace: RJ-7 | RJ-8 | RST | TX | A0 | RX | D0 | iModDom@ipleiria.pt | D1 | D5 | D2 | D6 | D3 | D7 | D4 | D8 | GND | 3.3V | 5V | RJ-7 | RJ-8 | RST | TX | A0 | RX | D0 | D1 | D5 | D2 | D6 | D3 | D7 | D4 | D8 | GND | 3.3V | 5V | RJ-7 | RJ-8 | RST | TX | A0 | RX | D0 | D1 | D5 | D2 | D6 | D3 | D7 | D4 | D8 | GND | 3.3V | 5V
tNames: RELAY | 1 | 2 | 1 | 4 | I/O EXPANDER | I/O EXPANDER | I/O EXPANDER | 5 | 6 | I/O EXPANDER | I/O EXPANDER | I/O EXPANDER | 3 | iModDom | RELAY | 2 | RELAY | 3
bNames: LP4 CANbus | UP4 CANbus | 6 CH | 5 CL | 6 CH | 5 CL | 8 LP4-8 | 7 LP4-7 | 8 UP4-8 | 7 UP4-7 | All Ports: Pins 1,2 - GND Pin 3 - 3.3V Pin 4 - 5V | LP1 | UP1 | 8 7 | 7 6 | 6 5 | 5 4 | LP3 I/O3 | 8 3 | 7 2 | 6 1 | 5 0 | UP3 I/O3 | LP2 | UP2 | 8 7 | 7 6 | 6 5 | 5 4 | LP2 I/O2 | 8 3 | 7 2 | 6 1 | 5 0 | UP2 I/O2 | RJ45 Pins | LP3 | UP3 | 1,2 - GND | 3 - 3.3V | 4 - 5V | 8 7 | 7 6 | 6 5 | 5 4 | LP1 I/O1 | 8 3 | 7 2 | 6 1 | 5 0 | UP1 I/O1 | 6 - CH | 5 - CL | 8 - RJ-8 | 7 - RJ-7 | LP4 | UP4 | RJ45 Pins | 1,2 - GND | 3 - 3.3V | 4 - 5V | 6 - CH | 5 - CL | 8 - RJ-8 | 7 - RJ-7 | RJ45 Pins | 1,2 - GND | 3 - 3.3V | 4 - 5V | 6 - CH | 5 - CL | 8 - RJ-8 | 7 - RJ-7